# Allegro board democ.brd
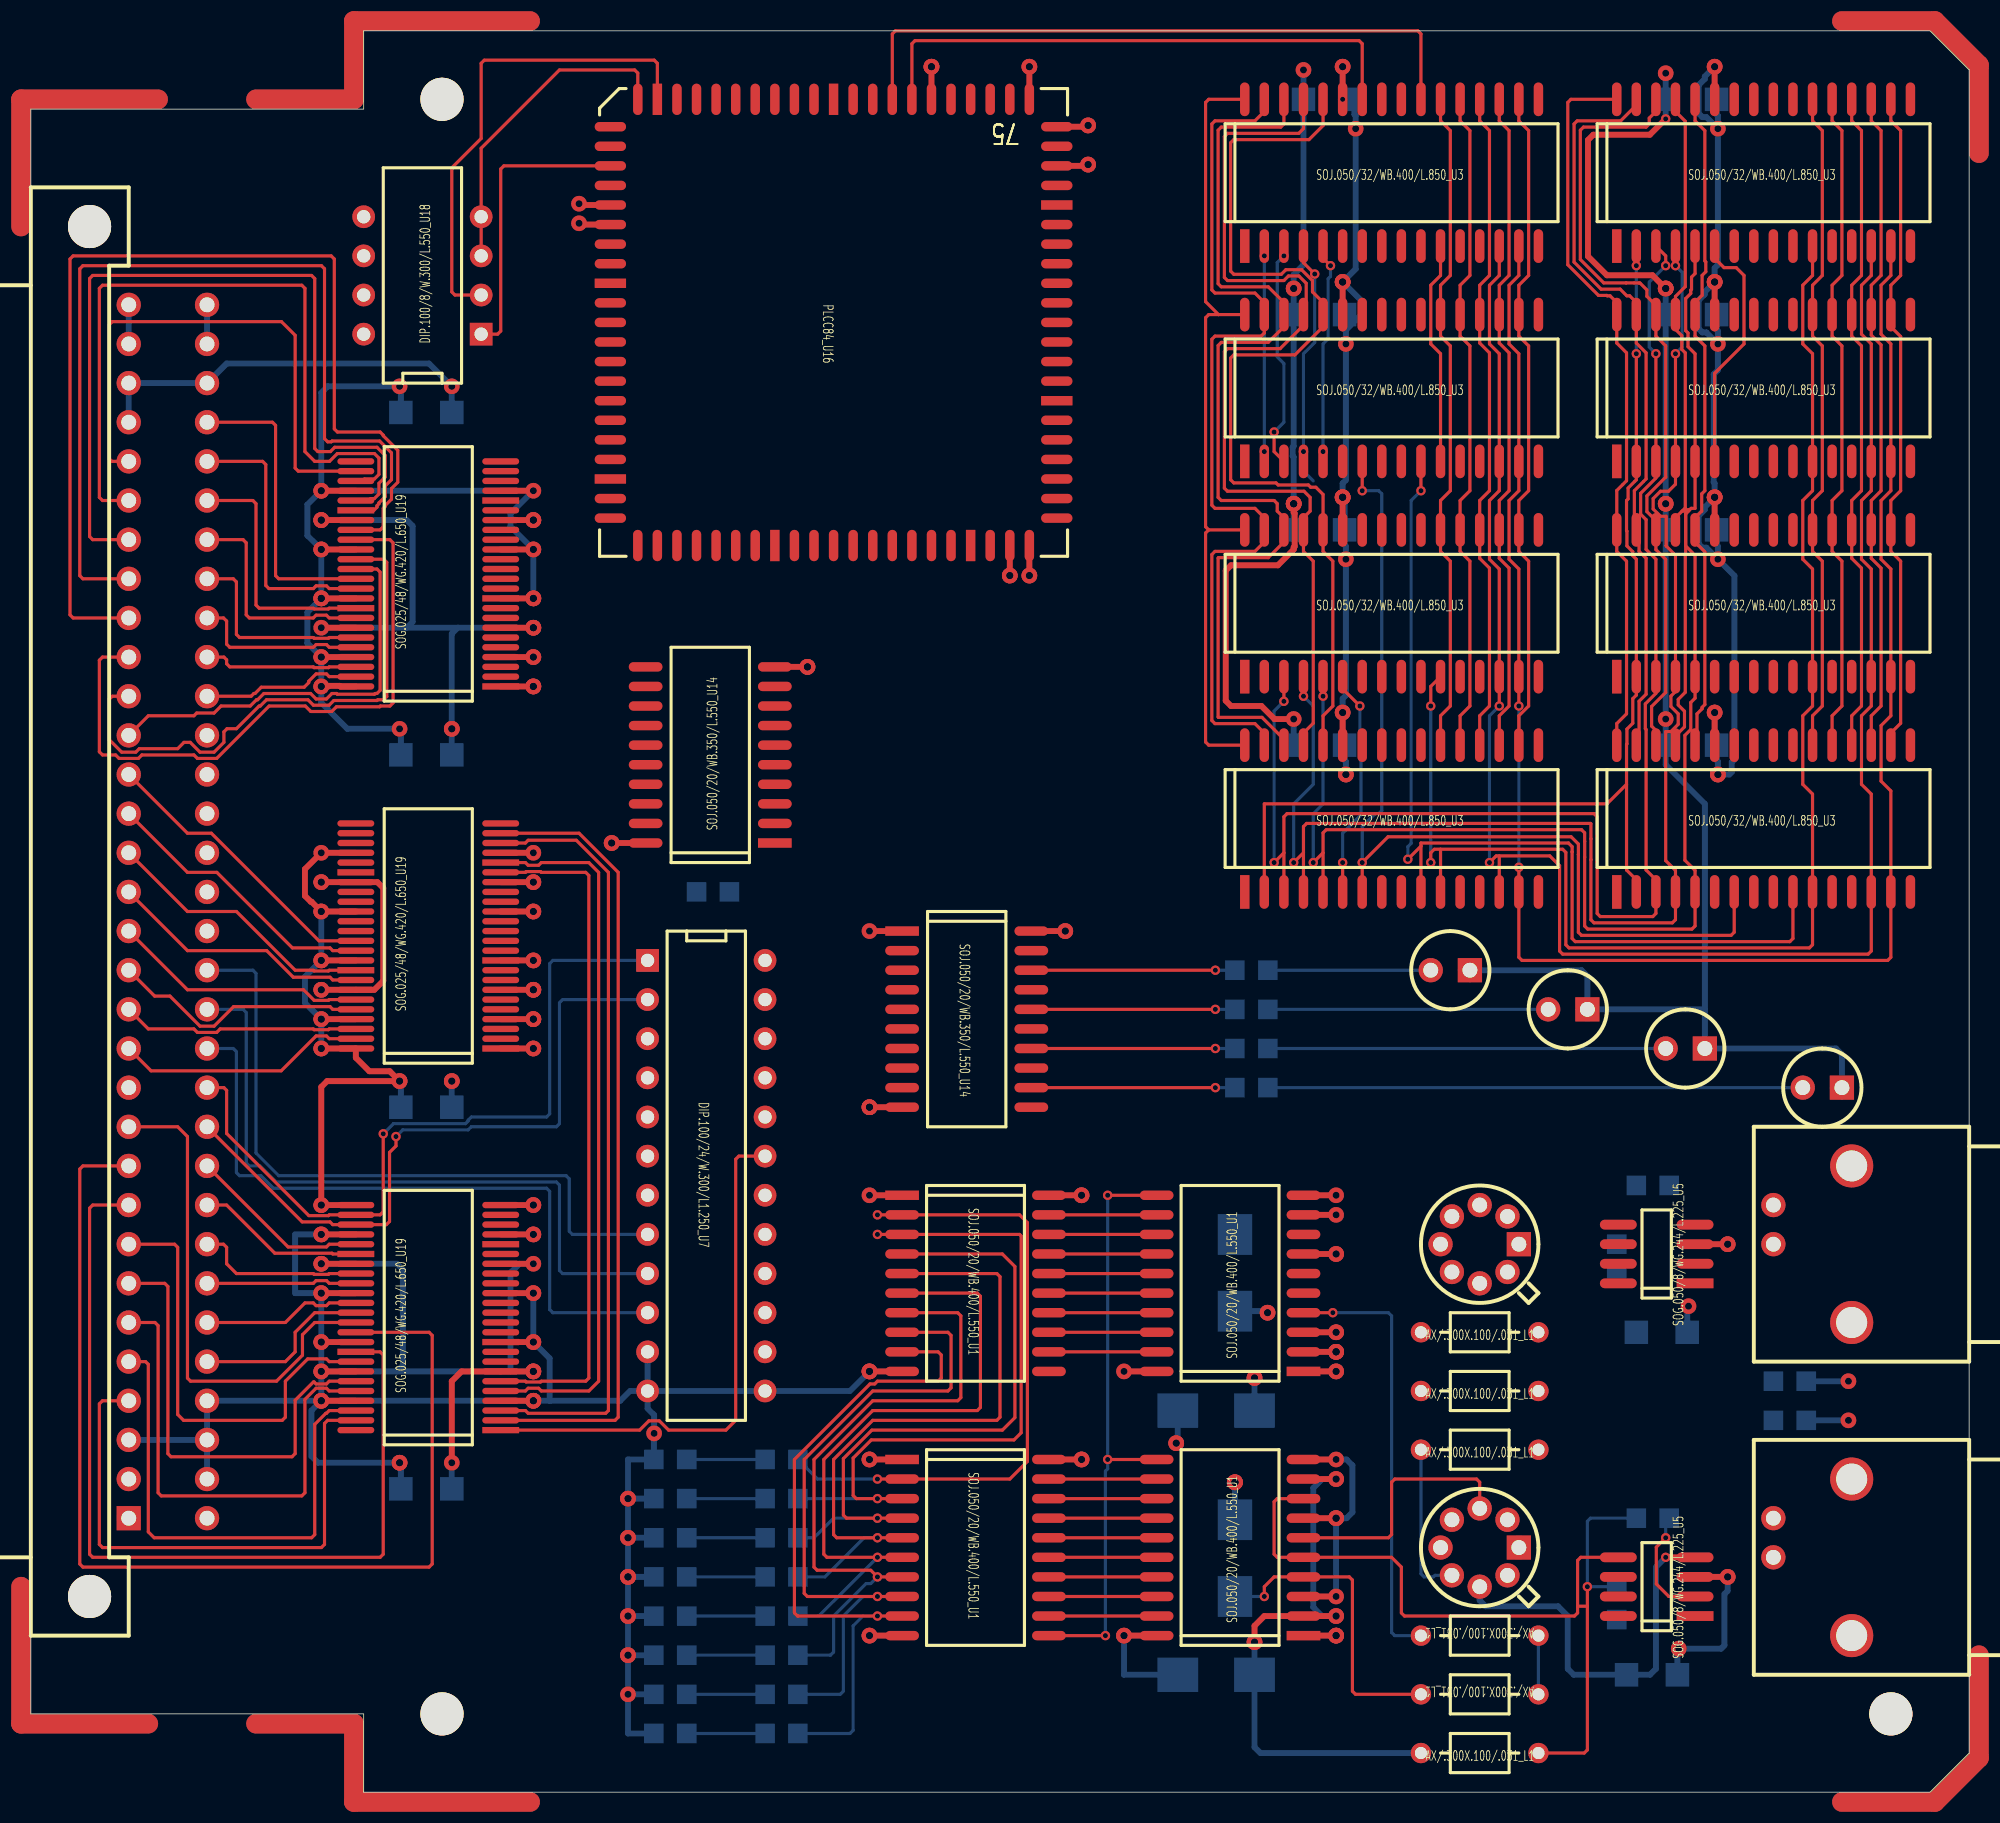
[diagram p0: board, top side]
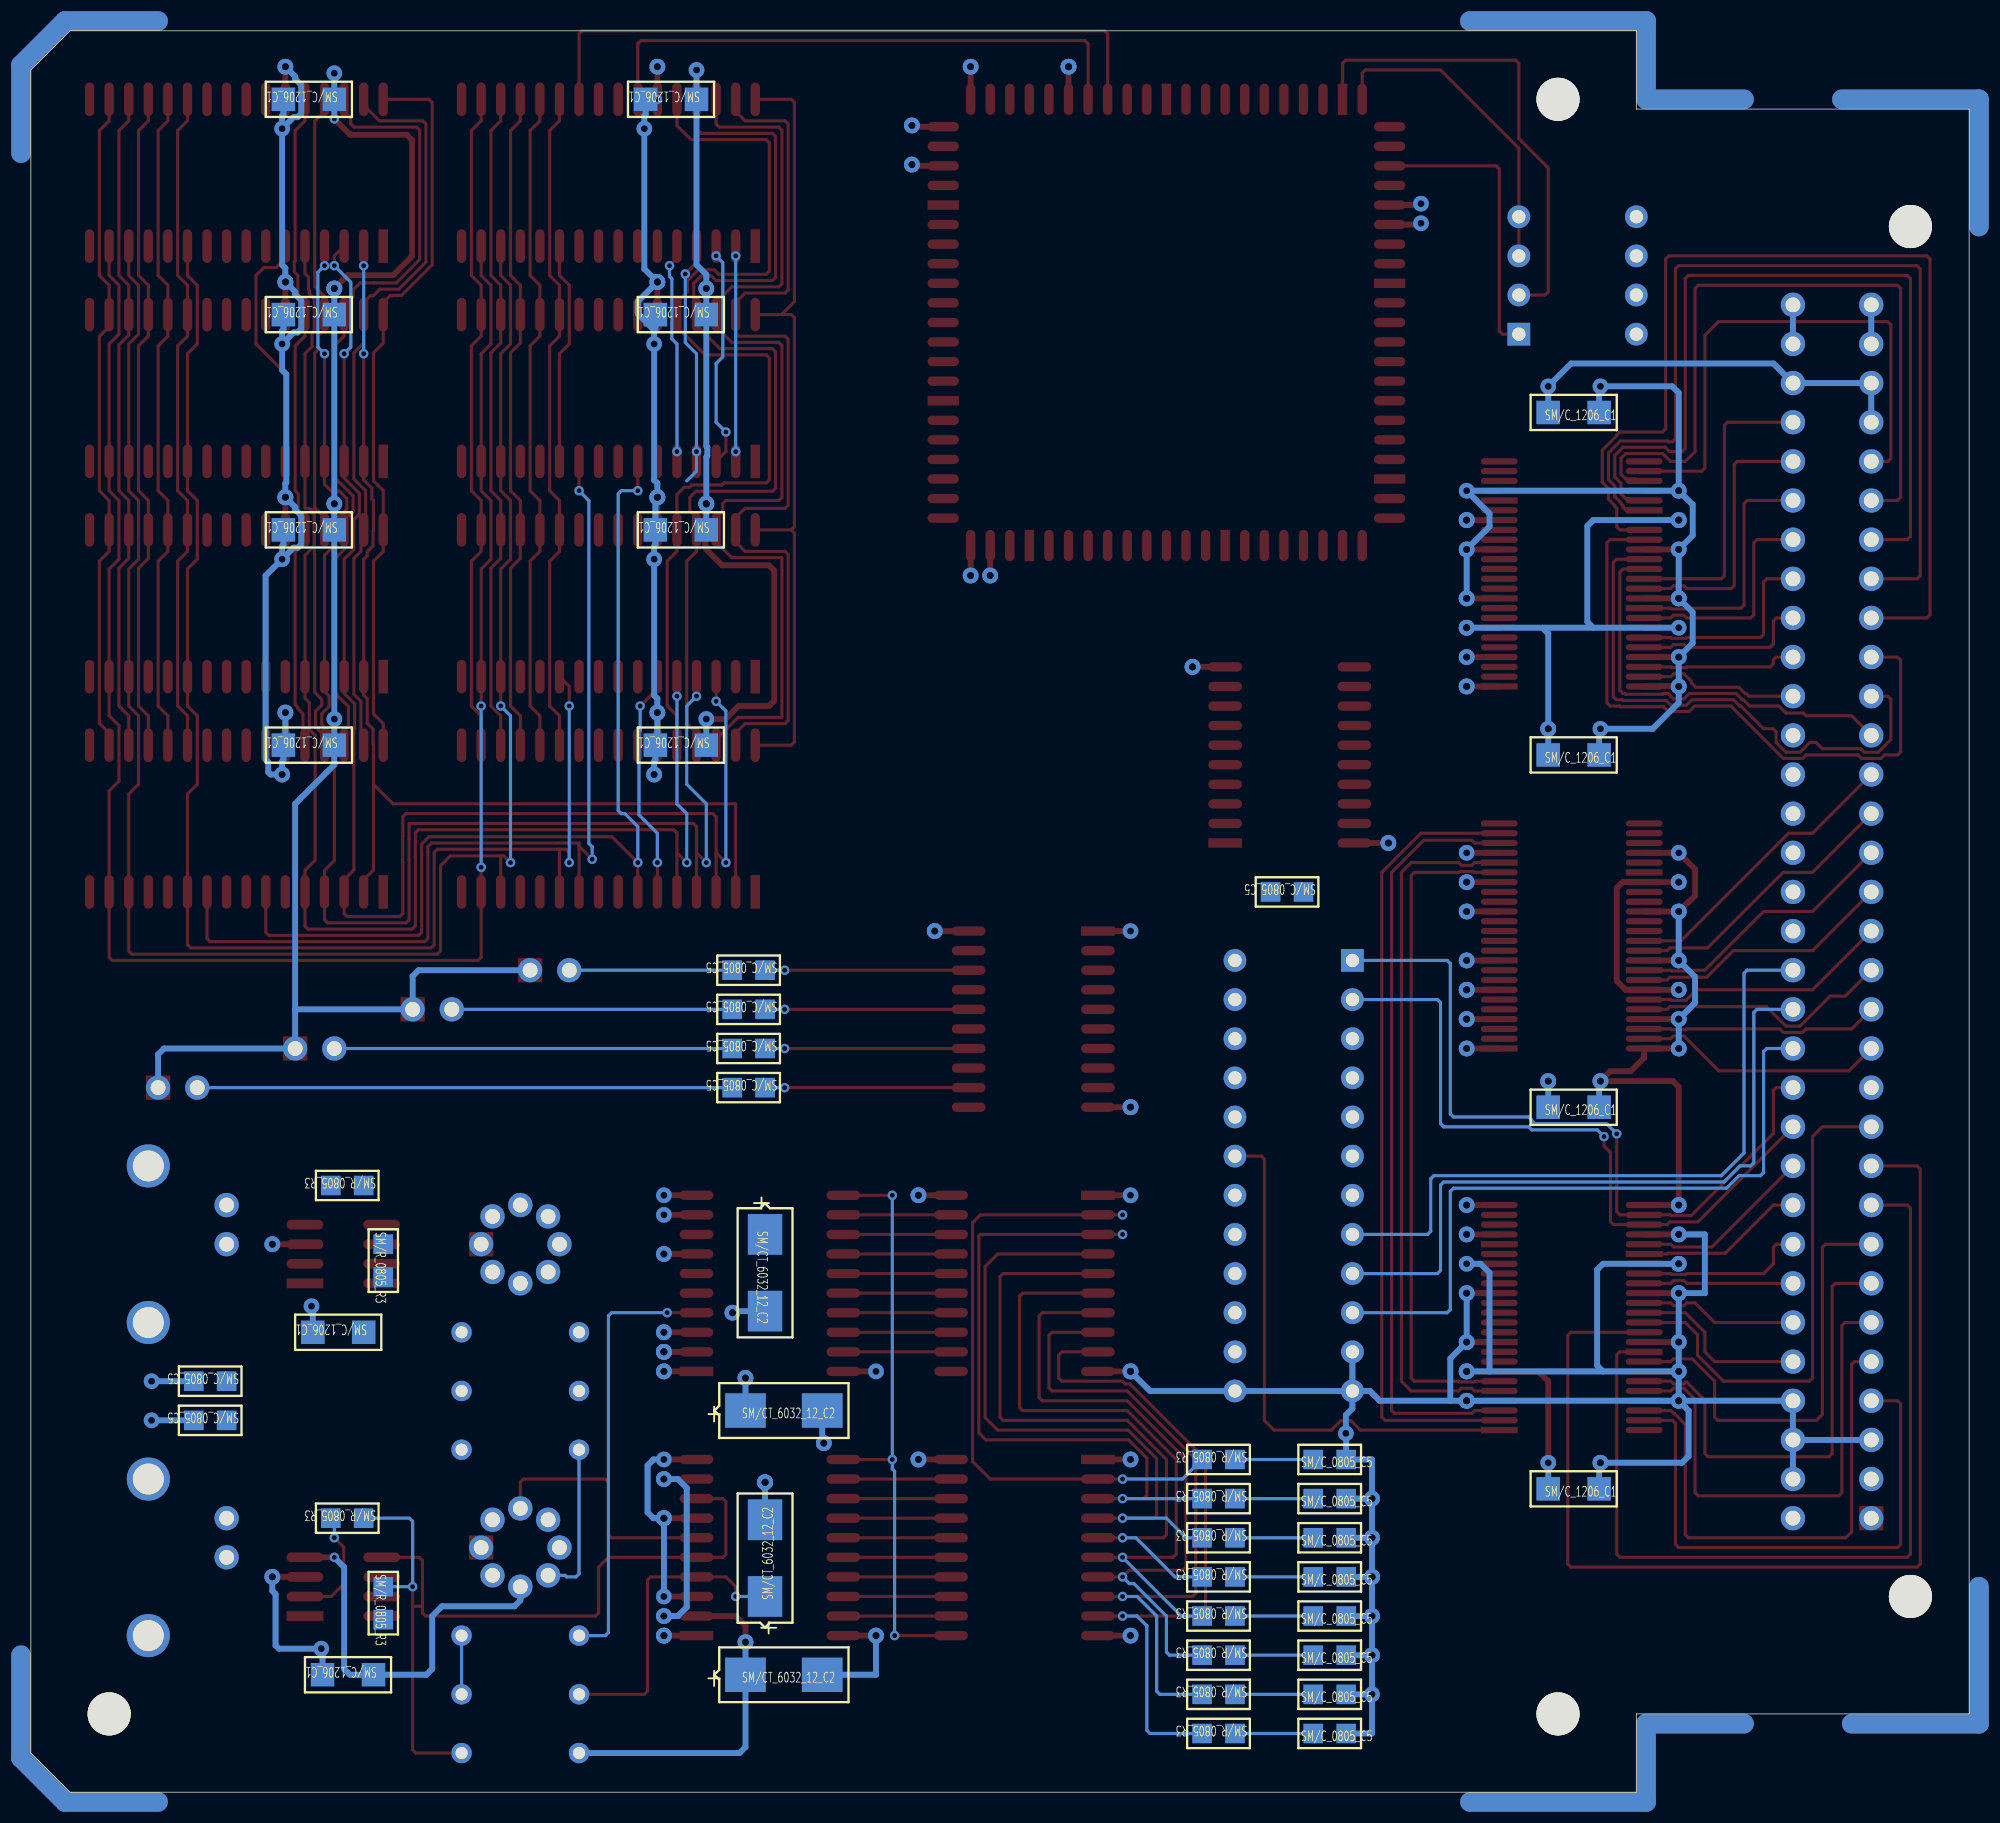
[diagram p1: board, bottom side, seen from below]

Outline 125.73 x 114.3 mm; copper layers: TOP, GND, POWER, BOTTOM. Coordinates in mm from the lower left corner of the outline.
Outline path: 0,109.22 21.59,109.22 21.59,114.3 123.19,114.3 125.73,111.76 125.73,2.54 123.19,0 21.59,0 21.59,5.08 0,5.08 0,109.22

## Design rules (mm)
nets with their own width: min track width 0.203; nets A0 A1 A2 A3 A4 A5 A6 A7 A8 A9 A10 A11 A12 A13 A14 A15 A16 A17 A18 A19 A20 A21 A22 A23 AEN/ BA0 BA1 BA2 BA3 BD0 BD1 BD2 BD3 BD4 BD5 BD6 BD7 BD8 BD9 BD10 BD11 BD12 BD13 BD14 BD15 BRD/ BRESET BWR/ D0 D1 D2 D3 D4 D5 D6 D7 D9 D10 D11 D12 D13 D14 D15 DDIR DEN/ DHEN/ FPGA/ GAIN HS/ MCLK MRD/ MWR/ N00036 N00036_6360 N00038 N00038_6372 N00044 N00044_6366 N00046 N00046_6362 N00048 N00048_6359 N00060 N00060_6368 N00306 N00318 N00322 N00671 N00689 N00703 N00717 N00827 N00831 N00835 N00837 N04966 N05690 N05692 N05694 N05696 N05698 N05700 N05702 N05704 N11940 N11950 N11984 N11994 N12004 N19706 N19710 N19714 N19718 N19934 N19938 N19942 N23417 N23878 N24816 N24821 N24826 N84247 N103899 N255822 N314771 N315146 N315333 N320476 N336036 N336041 OUTA OUTC RA0 RA1 RA2 RA3 RA4 RA5 RA6 RA7 RA8 RA9 RA10 RA11 RA12 RA13 RA14 RA15 RD0 RD1 RD2 RD3 RD4 RD5 RD6 RD7 RDY/ RESET/ SEL VCLKA VCLKC VD0 VD1 VD2 VD3 VD4 VD5 VD6 VD7 WAIT/ WSTAT/
nets with their own width: min track width 0.381; nets AGND GND GND_EARTH V12N V+12 VCC

## Placement (name value [footprint] x y rotation side)
C1  .1UF  [SMC1206]  104.14 29.84 0 bottom
C2  .1UF  [SMCT603212]  79.38 24.77 180 bottom
C3  .1UF  [SMCT603212]  79.38 7.62 180 bottom
C4  .1UF  [SMC1206]  106.05 109.86 0 bottom
C5  3300  [SMC0805]  42.55 6.35 180 bottom
C6  .1UF  [SMC1206]  103.51 7.62 0 bottom
C7  3300  [SMC0805]  42.55 21.59 180 bottom
C8  3300  [SMC0805]  42.55 8.89 180 bottom
C9  .1UF  [SMC1206]  27.3 89.53 180 bottom
C10  .1UF  [SMC1206]  27.3 67.31 180 bottom
C11  .1UF  [SMC1206]  27.3 44.45 180 bottom
C12  .1UF  [SMC1206]  106.05 81.91 0 bottom
C13  .1UF  [SMC1206]  106.05 95.89 0 bottom
C14  .1UF  [SMC1206]  106.05 67.95 0 bottom
C15  .1UF  [SMC1206]  27.3 19.69 180 bottom
C16  3300  [SMC0805]  42.55 11.43 180 bottom
C17  3300  [SMC0805]  42.55 13.97 180 bottom
C18  47PF  [SMC0805]  113.03 26.67 0 bottom
C19  3300  [SMC0805]  42.55 3.81 180 bottom
C20  3300  [SMC0805]  42.55 16.51 180 bottom
C21  .1UF  [SMCT603212]  78.11 12.7 90 bottom
C22  .1UF  [SMCT603212]  78.11 36.2 270 bottom
C23  47PF  [SMC0805]  113.03 24.13 0 bottom
C24  3300  [SMC0805]  42.55 19.05 180 bottom
C25  .1UF  [SMC1206]  82.55 109.86 0 bottom
C26  .1UF  [SMC1206]  81.92 95.89 0 bottom
C27  .1UF  [SMC1206]  81.92 81.91 0 bottom
C28  .1UF  [SMC1206]  81.92 67.95 0 bottom
D1  DIODE PHOTO EMIT  [LED]  100.97 50.8 180 top
D2  DIODE PHOTO EMIT  [LED]  93.34 53.34 180 top
D3  DIODE PHOTO EMIT  [LED]  108.59 48.26 180 top
D4  DIODE PHOTO EMIT  [LED]  117.48 45.72 180 top
J1  CON PAD  [DIN64P]  6.35 17.78 90 top
J2  CHANNEL 1  [BNC2P]  113.03 15.24 270 top
J3  CHANNEL 2  [BNC2P]  113.03 35.56 270 top
L1  50  [AX300X100031]  90.17 22.23 0 top
L2  50  [AX300X100031]  90.17 29.84 0 top
L3  50  [AX300X100031]  97.79 6.35 180 top
L4  50  [AX300X100031]  90.17 26.03 0 top
L5  50  [AX300X100031]  97.79 10.16 180 top
L6  50  [AX300X100031]  90.17 2.54 0 top
MTH1  -  [MTHOLE1]  26.67 109.86 0 top
MTH2  -  [MTHOLE1]  26.67 5.08 0 top
MTH3  -  [MTHOLE1]  120.65 5.08 0 top
R1  150  [SMC0805]  78.11 53.34 0 bottom
R2  150  [SMC0805]  78.11 50.8 0 bottom
R3  100  [SMR0805]  104.14 17.78 0 bottom
R4  100  [SMR0805]  102.87 13.34 270 bottom
R5  100  [SMR0805]  102.87 35.56 270 bottom
R6  100  [SMR0805]  104.14 39.37 0 bottom
R7  50  [SMR0805]  47.62 21.59 0 bottom
R8  50  [SMR0805]  47.62 8.89 0 bottom
R9  50  [SMR0805]  47.62 11.43 0 bottom
R10  50  [SMR0805]  47.62 6.35 0 bottom
R11  50  [SMC0805]  43.18 58.42 0 bottom
R12  150  [SMC0805]  78.11 45.72 0 bottom
R13  50  [SMR0805]  47.62 19.05 0 bottom
R14  50  [SMR0805]  47.62 16.51 0 bottom
R15  50  [SMR0805]  47.62 13.97 0 bottom
R16  50  [SMR0805]  47.62 3.81 0 bottom
R17  150  [SMC0805]  78.11 48.26 0 bottom
U1  TLC5602A  [SOJ05020WB400L550]  82.55 10.16 90 top
U2  TLC5602A  [SOJ05020WB400L550]  82.55 27.3 90 top
U3  TC55B4257J  [SOJ05032WB400L850]  102.87 86.36 0 top
U4  TC55B4257J  [SOJ05032WB400L850]  102.87 100.33 0 top
U5  DG419A  [SOG0508WG244L225]  107.95 33.02 90 top
U6  DG419A  [SOG0508WG244L225]  107.95 11.43 90 top
U7  20L10  [DIP10024W300L1250]  40 53.98 270 top
U8  TC55B4257J  [SOJ05032WB400L850]  78.74 72.39 0 top
U9  TC55B4257J  [SOJ05032WB400L850]  78.74 100.33 0 top
U10  TC55B4257J  [SOJ05032WB400L850]  102.87 72.39 0 top
U11  TC55B4257J  [SOJ05032WB400L850]  102.87 58.42 0 top
U12  TC55B4257J  [SOJ05032WB400L850]  78.74 58.42 0 top
U13  TC55B4257J  [SOJ05032WB400L850]  78.74 86.36 0 top
U14  ACT574  [SOJ05020WB350L550]  56.52 55.88 270 top
U15  ACT574  [SOJ05020WB400L550]  56.52 21.59 270 top
U16  EPF8282  [PLCC84]  52.07 109.86 270 top
U17  ACT574  [SOJ05020WB400L550]  56.52 38.73 270 top
U18  EPC1064  [DIP1008W300L550]  29.21 94.61 90 top
U19  FCT16245  [SOG02548WG420L650]  30.48 71.75 90 top
U20  FCT16245  [SOG02548WG420L650]  30.48 23.49 90 top
U21  FCT16245  [SOG02548WG420L650]  30.48 48.26 90 top
U22  TLE2037A  [TO-99]  96.52 35.56 90 top
U23  TLE2037A  [TO-99]  96.52 15.88 90 top
U25  74ACT574  [SOJ05020WB350L550]  48.26 61.59 90 top

## Library data of the parts
C1-C3 C5-C8 C16 C17 C19-C22 C24 = CAP: alternate symbols: (SMCT603212;SMC0805)
C4 C9-C15 C25-C28 = CAP_NP
C18 C23 = CAPACITOR
D1-D4 = DIODE_PHOTO_EMIT
J1 = 64CONSEPPINS
J2 J3 = BNC
L1-L6 = INDUCTOR
MTH1-MTH3 = MTHOLE1
R1-R17 = R: alternate symbols: (SMR0805)
U1 U2 = TLC5602A
U3 U4 U8-U13 = TC56B4257J
U5 U6 = DG419A
U7 = 20L10
U14 U15 U17 = ACT574: alternate symbols: (SOJ05020WB400L550)
U16 = FPGA_0
U18 = EPC1064
U19-U21 = FCT16245
U22 U23 = TLE2037A
U25 = 74ACT574

## Footprints (pads in the part's own frame, mm; a bottom-side part is the same pattern mirrored in y, then rotated)
AX300X100031
  round 1.321 hole 0.787: 1(0,0) 2(7.62,0)
BNC2P
  round 1.575 hole 0.965: 1(0,0) 2(-2.54,0)
  round 2.794 hole 2.007: 3(5.08,5.08) 4(-5.08,5.08)
DIN64P
  rect 1.575x1.575 hole 0.965: 1(0,0)
  round 1.575 hole 0.965: 2(2.54,0) 3(5.08,0) 4(7.62,0) 5(10.16,0) 6(12.7,0) 7(15.24,0) 8(17.78,0) 9(20.32,0) 10(22.86,0) 11(25.4,0) 12(27.94,0) 13(30.48,0) 14(33.02,0) 15(35.56,0) 16(38.1,0) 17(40.64,0) 18(43.18,0) 19(45.72,0) 20(48.26,0) 21(50.8,0) 22(53.34,0) 23(55.88,0) 24(58.42,0) 25(60.96,0) 26(63.5,0) 27(66.04,0) 28(68.58,0) 29(71.12,0) 30(73.66,0) 31(76.2,0) 32(78.74,0) 33(0,-5.08) 34(2.54,-5.08) 35(5.08,-5.08) 36(7.62,-5.08) 37(10.16,-5.08) 38(12.7,-5.08) 39(15.24,-5.08) 40(17.78,-5.08) 41(20.32,-5.08) 42(22.86,-5.08) 43(25.4,-5.08) 44(27.94,-5.08) 45(30.48,-5.08) 46(33.02,-5.08) 47(35.56,-5.08) 48(38.1,-5.08) 49(40.64,-5.08) 50(43.18,-5.08) 51(45.72,-5.08) 52(48.26,-5.08) 53(50.8,-5.08) 54(53.34,-5.08) 55(55.88,-5.08) 56(58.42,-5.08) 57(60.96,-5.08) 58(63.5,-5.08) 59(66.04,-5.08) 60(68.58,-5.08) 61(71.12,-5.08) 62(73.66,-5.08) 63(76.2,-5.08) 64(78.74,-5.08)
  round 2.794 hole 2.794: 65(83.82,2.54) 66(-5.08,2.54)
DIP1008W300L550
  rect 1.473x1.473 hole 0.864: 1(0,0)
  round 1.473 hole 0.864: 2(2.54,0) 3(5.08,0) 4(7.62,0) 5(7.62,7.62) 6(5.08,7.62) 7(2.54,7.62) 8(0,7.62)
DIP10024W300L1250
  rect 1.473x1.473 hole 0.864: 1(0,0)
  round 1.473 hole 0.864: 2(2.54,0) 3(5.08,0) 4(7.62,0) 5(10.16,0) 6(12.7,0) 7(15.24,0) 8(17.78,0) 9(20.32,0) 10(22.86,0) 11(25.4,0) 12(27.94,0) 13(27.94,7.62) 14(25.4,7.62) 15(22.86,7.62) 16(20.32,7.62) 17(17.78,7.62) 18(15.24,7.62) 19(12.7,7.62) 20(10.16,7.62) 21(7.62,7.62) 22(5.08,7.62) 23(2.54,7.62) 24(0,7.62)
LED
  rect 1.575x1.575 hole 0.965: 1(0,0)
  round 1.575 hole 0.965: 2(2.54,0)
MTHOLE1
  round 2.794 hole 2.794: 1(0,0)
PLCC84
  rect 2.032x0.61 smd: 1(0,0) 10(0,-11.43) 40(28.956,-3.81) 50(28.956,8.89)
  oval 2.032x0.61 smd: 2(0,-1.27) 3(0,-2.54) 4(0,-3.81) 5(0,-5.08) 6(0,-6.35) 7(0,-7.62) 8(0,-8.89) 9(0,-10.16) 11(0,-12.7) 33(28.956,-12.7) 34(28.956,-11.43) 35(28.956,-10.16) 36(28.956,-8.89) 37(28.956,-7.62) 38(28.956,-6.35) 39(28.956,-5.08) 41(28.956,-2.54) 42(28.956,-1.27) 43(28.956,0) 44(28.956,1.27) 45(28.956,2.54) 46(28.956,3.81) 47(28.956,5.08) 48(28.956,6.35) 49(28.956,7.62) 51(28.956,10.16) 52(28.956,11.43) 53(28.956,12.7) 75(0,12.7) 76(0,11.43) 77(0,10.16) 78(0,8.89) 79(0,7.62) 80(0,6.35) 81(0,5.08) 82(0,3.81) 83(0,2.54) 84(0,1.27)
  oval 0.61x2.032 smd: 12(1.778,-14.478) 13(3.048,-14.478) 14(4.318,-14.478) 15(5.588,-14.478) 16(6.858,-14.478) 17(8.128,-14.478) 18(9.398,-14.478) 19(10.668,-14.478) 21(13.208,-14.478) 22(14.478,-14.478) 23(15.748,-14.478) 24(17.018,-14.478) 25(18.288,-14.478) 26(19.558,-14.478) 27(20.828,-14.478) 28(22.098,-14.478) 29(23.368,-14.478) 31(25.908,-14.478) 32(27.178,-14.478) 54(27.178,14.478) 55(25.908,14.478) 56(24.638,14.478) 57(23.368,14.478) 58(22.098,14.478) 59(20.828,14.478) 61(18.288,14.478) 62(17.018,14.478) 63(15.748,14.478) 64(14.478,14.478) 65(13.208,14.478) 66(11.938,14.478) 67(10.668,14.478) 68(9.398,14.478) 69(8.128,14.478) 71(5.588,14.478) 72(4.318,14.478) 73(3.048,14.478) 74(1.778,14.478)
  rect 0.61x2.032 smd: 20(11.938,-14.478) 30(24.638,-14.478) 60(19.558,14.478) 70(6.858,14.478)
SMC0805
  rect 1.27x1.27 smd: 1(0,0) 2(2.134,0)
SMC1206
  rect 1.524x1.524 smd: 1(0,0) 2(3.302,0)
SMCT603212
  rect 2.642x2.235 smd: 1(0,0) 2(4.978,0)
SMR0805
  rect 1.27x1.27 smd: 1(0,0) 2(2.134,0)
SOG0508WG244L225
  rect 0.635x2.388 smd: 1(0,0)
  oval 0.635x2.388 smd: 2(1.27,0) 3(2.54,0) 4(3.81,0) 5(3.81,4.978) 6(2.54,4.978) 7(1.27,4.978) 8(0,4.978)
SOG02548WG420L650
  rect 0.406x2.388 smd: 1(0,0) 10(5.715,0) 20(12.065,0) 30(11.43,9.398) 40(5.08,9.398)
  oval 0.406x2.388 smd: 2(0.635,0) 3(1.27,0) 4(1.905,0) 5(2.54,0) 6(3.175,0) 7(3.81,0) 8(4.445,0) 9(5.08,0) 11(6.35,0) 12(6.985,0) 13(7.62,0) 14(8.255,0) 15(8.89,0) 16(9.525,0) 17(10.16,0) 18(10.795,0) 19(11.43,0) 21(12.7,0) 22(13.335,0) 23(13.97,0) 24(14.605,0) 25(14.605,9.398) 26(13.97,9.398) 27(13.335,9.398) 28(12.7,9.398) 29(12.065,9.398) 31(10.795,9.398) 32(10.16,9.398) 33(9.525,9.398) 34(8.89,9.398) 35(8.255,9.398) 36(7.62,9.398) 37(6.985,9.398) 38(6.35,9.398) 39(5.715,9.398) 41(4.445,9.398) 42(3.81,9.398) 43(3.175,9.398) 44(2.54,9.398) 45(1.905,9.398) 46(1.27,9.398) 47(0.635,9.398) 48(0,9.398)
SOJ05020WB350L550
  rect 0.61x2.184 smd: 1(0,0)
  oval 0.61x2.184 smd: 2(1.27,0) 3(2.54,0) 4(3.81,0) 5(5.08,0) 6(6.35,0) 7(7.62,0) 8(8.89,0) 9(10.16,0) 10(11.43,0) 11(11.43,8.382) 12(10.16,8.382) 13(8.89,8.382) 14(7.62,8.382) 15(6.35,8.382) 16(5.08,8.382) 17(3.81,8.382) 18(2.54,8.382) 19(1.27,8.382) 20(0,8.382)
SOJ05020WB400L550
  rect 0.61x2.184 smd: 1(0,0)
  oval 0.61x2.184 smd: 2(1.27,0) 3(2.54,0) 4(3.81,0) 5(5.08,0) 6(6.35,0) 7(7.62,0) 8(8.89,0) 9(10.16,0) 10(11.43,0) 11(11.43,9.525) 12(10.16,9.525) 13(8.89,9.525) 14(7.62,9.525) 15(6.35,9.525) 16(5.08,9.525) 17(3.81,9.525) 18(2.54,9.525) 19(1.27,9.525) 20(0,9.525)
SOJ05032WB400L850
  rect 0.61x2.184 smd: 1(0,0)
  oval 0.61x2.184 smd: 2(1.27,0) 3(2.54,0) 4(3.81,0) 5(5.08,0) 6(6.35,0) 7(7.62,0) 8(8.89,0) 9(10.16,0) 10(11.43,0) 11(12.7,0) 12(13.97,0) 13(15.24,0) 14(16.51,0) 15(17.78,0) 16(19.05,0) 17(19.05,9.525) 18(17.78,9.525) 19(16.51,9.525) 20(15.24,9.525) 21(13.97,9.525) 22(12.7,9.525) 23(11.43,9.525) 24(10.16,9.525) 25(8.89,9.525) 26(7.62,9.525) 27(6.35,9.525) 28(5.08,9.525) 29(3.81,9.525) 30(2.54,9.525) 31(1.27,9.525) 32(0,9.525)
TO-99
  rect 1.575x1.575 hole 0.965: 1(0,0)
  round 1.575 hole 0.965: 2(1.803,0.737) 3(2.54,2.54) 4(1.803,4.343) 5(0,5.08) 6(-1.803,4.343) 7(-2.54,2.54) 8(-1.803,0.737)

## Nets
AGND: C1.2(TP-2) C6.2(TP-2) C21.2(TP-2) C22.2(TP-2) J1.1(TP-1) J1.2(TP-2) J1.33(TP-33) U1.3(TP-3) U1.7(TP-7) U1.10(TP-10) U2.3(TP-3) U2.7(TP-7) U2.10(TP-10) U5.3(TP-3) U6.3(TP-3)
GND: C2.2(TP-2) C3.2(TP-2) C4.2(TP-2) C5.2(TP-2) C7.2(TP-2) C8.2(TP-2) C9.2(TP-2) C10.2(TP-2) C11.2(TP-2) C12.2(TP-2) C13.2(TP-2) C14.2(TP-2) C15.2(TP-2) C16.2(TP-2) C17.2(TP-2) C19.2(TP-2) C20.2(TP-2) C24.2(TP-2) C25.2(TP-2) C26.2(TP-2) C27.2(TP-2) C28.2(TP-2) J1.3(TP-3) J1.34(TP-34) J1.35(TP-35) J1.36(TP-36) U1.1(TP-1) U1.20(TP-20) U2.1(TP-1) U2.20(TP-20) U3.27(TP-27) U4.27(TP-27) U7.11(TP-11) U7.12(TP-12) U7.13(TP-13) U8.27(TP-27) U9.27(TP-27) U10.27(TP-27) U11.27(TP-27) U12.27(TP-27) U13.27(TP-27) U14.1(TP-1) U14.10(TP-10) U15.1(TP-1) U15.10(TP-10) U16.17(TP-17) U16.53(TP-53) U16.74(TP-74) U16.75(TP-75) U17.1(TP-1) U17.10(TP-10) U19.1(TP-1) U19.4(TP-4) U19.10(TP-10) U19.15(TP-15) U19.21(TP-21) U19.28(TP-28) U19.34(TP-34) U19.39(TP-39) U19.45(TP-45) U19.48(TP-48) U20.4(TP-4) U20.10(TP-10) U20.15(TP-15) U20.21(TP-21) U20.24(TP-24) U20.25(TP-25) U20.28(TP-28) U20.34(TP-34) U20.39(TP-39) U20.45(TP-45) U21.1(TP-1) U21.4(TP-4) U21.10(TP-10) U21.15(TP-15) U21.21(TP-21) U21.28(TP-28) U21.34(TP-34) U21.39(TP-39) U21.45(TP-45) U21.48(TP-48) U25.10(TP-10)
GND_EARTH: C18.2(TP-2) C23.2(TP-2) J2.2(TP-2) J3.2(TP-2)
V12N: J1.31(TP-31) J1.32(TP-32) U5.7(TP-7) U6.7(TP-7) U22.4(TP-4) U23.4(TP-4)
VCC: C2.1(TP-1) C3.1(TP-1) C4.1(TP-1) C9.1(TP-1) C10.1(TP-1) C11.1(TP-1) C12.1(TP-1) C13.1(TP-1) C14.1(TP-1) C15.1(TP-1) C25.1(TP-1) C26.1(TP-1) C27.1(TP-1) C28.1(TP-1) D1.1(TP-1) D2.1(TP-1) D3.1(TP-1) D4.1(TP-1) J1.29(TP-29) J1.30(TP-30) J1.62(TP-62) L2.1(TP-1) L6.1(TP-1) U1.2(TP-2) U1.9(TP-9) U2.2(TP-2) U2.9(TP-9) U7.24(TP-24) U14.20(TP-20) U15.20(TP-20) U16.16(TP-16) U16.52(TP-52) U16.72(TP-72) U16.80(TP-80) U17.20(TP-20) U19.7(TP-7) U19.18(TP-18) U19.31(TP-31) U19.42(TP-42) U20.7(TP-7) U20.18(TP-18) U20.31(TP-31) U20.42(TP-42) U21.7(TP-7) U21.18(TP-18) U21.31(TP-31) U21.42(TP-42) U25.20(TP-20)
A0: J1.54(TP-54) U19.47(TP-47)
A1: J1.55(TP-55) U19.46(TP-46)
A2: J1.56(TP-56) U19.44(TP-44)
A3: J1.57(TP-57) U19.43(TP-43)
A4: J1.58(TP-58) U19.41(TP-41)
A5: J1.59(TP-59) U19.40(TP-40)
A6: J1.60(TP-60) U19.38(TP-38)
A7: J1.61(TP-61) U19.37(TP-37)
A8: J1.13(TP-13) U21.47(TP-47)
A9: J1.14(TP-14) U21.46(TP-46)
A10: J1.15(TP-15) U21.44(TP-44)
A11: J1.16(TP-16) U21.43(TP-43)
A12: J1.17(TP-17) U21.41(TP-41)
A13: J1.18(TP-18) U21.40(TP-40)
A14: J1.19(TP-19) U21.38(TP-38)
A15: J1.20(TP-20) U21.37(TP-37)
A16: J1.37(TP-37) U20.36(TP-36)
A17: J1.38(TP-38) U20.35(TP-35)
A18: J1.39(TP-39) U7.6(TP-6) U20.33(TP-33)
A19: J1.40(TP-40) U7.5(TP-5) U20.32(TP-32)
A20: J1.41(TP-41) U7.4(TP-4) U20.30(TP-30)
A21: J1.42(TP-42) U7.3(TP-3) U20.29(TP-29)
A22: J1.43(TP-43) U7.2(TP-2) U20.27(TP-27)
A23: J1.44(TP-44) U7.1(TP-1) U20.26(TP-26)
AEN/: J1.47(TP-47) U7.8(TP-8)
BA0: U16.6(TP-6) U19.2(TP-2) U20.13(TP-13) U21.2(TP-2)
BA1: U16.7(TP-7) U19.3(TP-3) U20.14(TP-14) U21.3(TP-3)
BA2: U16.8(TP-8) U19.5(TP-5) U20.16(TP-16) U21.5(TP-5)
BA3: U16.9(TP-9) U19.6(TP-6) U20.17(TP-17) U21.6(TP-6)
BD0: U16.25(TP-25) U19.13(TP-13)
BD1: U16.24(TP-24) U19.14(TP-14)
BD2: U16.23(TP-23) U19.16(TP-16)
BD3: U16.22(TP-22) U19.17(TP-17)
BD4: U16.21(TP-21) U19.19(TP-19)
BD5: U16.20(TP-20) U19.20(TP-20)
BD6: U16.19(TP-19) U19.22(TP-22)
BD7: U16.18(TP-18) U19.23(TP-23)
BD8: U20.2(TP-2) U21.23(TP-23)
BD9: U20.3(TP-3) U21.22(TP-22)
BD10: U20.5(TP-5) U21.20(TP-20)
BD11: U20.6(TP-6) U21.19(TP-19)
BD12: U20.8(TP-8) U21.17(TP-17)
BD13: U20.9(TP-9) U21.16(TP-16)
BD14: U20.11(TP-11) U21.14(TP-14)
BD15: U20.12(TP-12) U21.13(TP-13)
BRD/: U7.15(TP-15) U16.73(TP-73)
BRESET: U7.14(TP-14) U16.12(TP-12)
BWR/: U7.16(TP-16) U16.54(TP-54)
D0: J1.28(TP-28) U19.26(TP-26) U21.26(TP-26)
D1: J1.27(TP-27) U19.27(TP-27) U21.27(TP-27)
D2: J1.26(TP-26) U19.29(TP-29) U21.29(TP-29)
D3: J1.25(TP-25) U19.30(TP-30) U21.30(TP-30)
D4: J1.24(TP-24) U19.32(TP-32) U21.32(TP-32)
D5: J1.23(TP-23) U19.33(TP-33) U21.33(TP-33)
D6: J1.4(TP-4) J1.22(TP-22) U19.35(TP-35) U20.47(TP-47) U21.35(TP-35)
D7: J1.21(TP-21) U19.36(TP-36) U21.36(TP-36)
D9: J1.5(TP-5) U20.46(TP-46)
D10: J1.6(TP-6) U20.44(TP-44)
D11: J1.7(TP-7) U20.43(TP-43)
D12: J1.8(TP-8) U20.41(TP-41)
D13: J1.9(TP-9) U20.40(TP-40)
D14: J1.10(TP-10) U20.38(TP-38)
D15: J1.11(TP-11) U20.37(TP-37)
DDIR: U7.19(TP-19) U19.24(TP-24) U20.1(TP-1) U21.24(TP-24)
DEN/: U7.20(TP-20) U19.25(TP-25) U20.48(TP-48)
DHEN/: U7.21(TP-21) U21.25(TP-25)
FPGA/: U7.17(TP-17) U16.30(TP-30)
GAIN: U5.6(TP-6) U6.6(TP-6) U16.28(TP-28)
HS/: U7.18(TP-18) U16.29(TP-29)
MCLK: J1.52(TP-52) U16.31(TP-31)
MRD/: J1.46(TP-46) U7.9(TP-9)
MWR/: J1.45(TP-45) U7.10(TP-10)
N00036_6360: L6.2(TP-2) R3.1(TP-1) R4.1(TP-1) U1.5(TP-5) U1.8(TP-8) U6.5(TP-5)
N00038_6372: C21.1(TP-1) L3.2(TP-2) U1.4(TP-4)
N00044_6366: U6.1(TP-1) U23.2(TP-2)
N00046_6362: R4.2(TP-2) U6.8(TP-8)
N00048_6359: R3.2(TP-2) U6.2(TP-2)
N00060_6368: U1.6(TP-6) U23.3(TP-3)
OUTA: L1.1(TP-1) U23.6(TP-6)
OUTC: L4.1(TP-1) U22.6(TP-6)
RA0: U3.5(TP-5) U4.5(TP-5) U8.5(TP-5) U9.5(TP-5) U10.5(TP-5) U11.5(TP-5) U12.5(TP-5) U13.5(TP-5) U16.58(TP-58)
RA1: U3.4(TP-4) U4.4(TP-4) U8.4(TP-4) U9.4(TP-4) U10.4(TP-4) U11.4(TP-4) U12.4(TP-4) U13.4(TP-4) U16.60(TP-60)
RA2: U3.3(TP-3) U4.3(TP-3) U8.3(TP-3) U9.3(TP-3) U10.3(TP-3) U11.3(TP-3) U12.3(TP-3) U13.3(TP-3) U16.61(TP-61)
RA3: U3.2(TP-2) U4.2(TP-2) U8.2(TP-2) U9.2(TP-2) U10.2(TP-2) U11.2(TP-2) U12.2(TP-2) U13.2(TP-2) U16.62(TP-62)
RA4: U3.32(TP-32) U4.32(TP-32) U8.32(TP-32) U9.32(TP-32) U10.32(TP-32) U11.32(TP-32) U12.32(TP-32) U13.32(TP-32) U16.63(TP-63)
RA5: U3.31(TP-31) U4.31(TP-31) U8.31(TP-31) U9.31(TP-31) U10.31(TP-31) U11.31(TP-31) U12.31(TP-31) U13.31(TP-31) U16.64(TP-64)
RA6: U3.30(TP-30) U4.30(TP-30) U8.30(TP-30) U9.30(TP-30) U10.30(TP-30) U11.30(TP-30) U12.30(TP-30) U13.30(TP-30) U16.65(TP-65)
RA7: U3.29(TP-29) U4.29(TP-29) U8.29(TP-29) U9.29(TP-29) U10.29(TP-29) U11.29(TP-29) U12.29(TP-29) U13.29(TP-29) U16.66(TP-66)
RA8: U3.28(TP-28) U4.28(TP-28) U8.28(TP-28) U9.28(TP-28) U10.28(TP-28) U11.28(TP-28) U12.28(TP-28) U13.28(TP-28) U16.67(TP-67)
RA9: U3.22(TP-22) U4.22(TP-22) U8.22(TP-22) U9.22(TP-22) U10.22(TP-22) U11.22(TP-22) U12.22(TP-22) U13.22(TP-22) U16.69(TP-69)
RA10: U3.21(TP-21) U4.21(TP-21) U8.21(TP-21) U9.21(TP-21) U10.21(TP-21) U11.21(TP-21) U12.21(TP-21) U13.21(TP-21) U16.70(TP-70)
RA11: U3.20(TP-20) U4.20(TP-20) U8.20(TP-20) U9.20(TP-20) U10.20(TP-20) U11.20(TP-20) U12.20(TP-20) U13.20(TP-20) U16.71(TP-71)
RA12: U3.19(TP-19) U4.19(TP-19) U8.19(TP-19) U9.19(TP-19) U10.19(TP-19) U11.19(TP-19) U12.19(TP-19) U13.19(TP-19) U16.76(TP-76)
RA13: U3.18(TP-18) U4.18(TP-18) U8.18(TP-18) U9.18(TP-18) U10.18(TP-18) U11.18(TP-18) U12.18(TP-18) U13.18(TP-18) U16.77(TP-77)
RA14: U3.15(TP-15) U4.15(TP-15) U8.15(TP-15) U9.15(TP-15) U10.15(TP-15) U11.15(TP-15) U12.15(TP-15) U13.15(TP-15) U16.78(TP-78)
RA15: U3.14(TP-14) U4.14(TP-14) U8.14(TP-14) U9.14(TP-14) U10.14(TP-14) U11.14(TP-14) U12.14(TP-14) U13.14(TP-14) U16.79(TP-79)
RD0: U4.26(TP-26) U8.26(TP-26) U9.26(TP-26) U10.26(TP-26) U16.81(TP-81)
RD1: U4.23(TP-23) U8.23(TP-23) U9.23(TP-23) U10.23(TP-23) U16.82(TP-82)
RD2: U4.10(TP-10) U8.10(TP-10) U9.10(TP-10) U10.10(TP-10) U16.83(TP-83)
RD3: U4.7(TP-7) U8.7(TP-7) U9.7(TP-7) U10.7(TP-7) U16.84(TP-84)
RD4: U3.26(TP-26) U11.26(TP-26) U12.26(TP-26) U13.26(TP-26) U16.1(TP-1)
RD5: U3.23(TP-23) U11.23(TP-23) U12.23(TP-23) U13.23(TP-23) U16.2(TP-2)
RD6: U3.10(TP-10) U11.10(TP-10) U12.10(TP-10) U13.10(TP-10) U16.3(TP-3)
RD7: U3.7(TP-7) U11.7(TP-7) U12.7(TP-7) U13.7(TP-7) U16.4(TP-4)
RDY/: J1.50(TP-50) U7.22(TP-22)
RESET/: J1.53(TP-53) U16.15(TP-15)
SEL: U7.23(TP-23) U16.13(TP-13)
V+12: C1.1(TP-1) C6.1(TP-1) J1.63(TP-63) J1.64(TP-64) U5.4(TP-4) U6.4(TP-4) U22.7(TP-7) U23.7(TP-7)
VCLKA: U1.11(TP-11) U2.11(TP-11) U15.11(TP-11) U16.34(TP-34)
VCLKC: R11.2(TP-2) U17.11(TP-11)
VD0: R7.2(TP-2) U14.2(TP-2) U15.2(TP-2) U16.39(TP-39) U17.2(TP-2)
VD1: R13.2(TP-2) U14.3(TP-3) U15.3(TP-3) U16.40(TP-40) U17.3(TP-3)
VD2: R14.2(TP-2) U14.4(TP-4) U15.4(TP-4) U16.41(TP-41) U17.4(TP-4)
VD3: R15.2(TP-2) U14.5(TP-5) U15.5(TP-5) U16.42(TP-42) U17.5(TP-5)
VD4: R9.2(TP-2) U14.6(TP-6) U15.6(TP-6) U16.43(TP-43) U17.6(TP-6)
VD5: R8.2(TP-2) U14.7(TP-7) U15.7(TP-7) U16.44(TP-44) U17.7(TP-7)
VD6: R10.2(TP-2) U14.8(TP-8) U15.8(TP-8) U16.45(TP-45) U17.8(TP-8)
VD7: R16.2(TP-2) U14.9(TP-9) U15.9(TP-9) U16.46(TP-46) U17.9(TP-9)
WAIT/: J1.51(TP-51) U16.33(TP-33)
WSTAT/: U14.11(TP-11) U16.56(TP-56)
N00036: L2.2(TP-2) R5.1(TP-1) R6.1(TP-1) U2.5(TP-5) U2.8(TP-8) U5.5(TP-5)
N00038: C22.1(TP-1) L5.2(TP-2) U2.4(TP-4)
N00044: U5.1(TP-1) U22.2(TP-2)
N00046: R5.2(TP-2) U5.8(TP-8)
N00048: R6.2(TP-2) U5.2(TP-2)
N00060: U2.6(TP-6) U22.3(TP-3)
N00306: U1.12(TP-12) U15.19(TP-19)
N00318: U1.15(TP-15) U15.16(TP-16)
N00322: U1.16(TP-16) U15.15(TP-15)
N00671: C19.1(TP-1) R16.1(TP-1)
N00689: C5.1(TP-1) R10.1(TP-1)
N00703: C8.1(TP-1) R8.1(TP-1)
N00717: C16.1(TP-1) R9.1(TP-1)
N00827: C17.1(TP-1) R15.1(TP-1)
N00831: C20.1(TP-1) R14.1(TP-1)
N00835: C24.1(TP-1) R13.1(TP-1)
N00837: C7.1(TP-1) R7.1(TP-1)
N04966: L3.1(TP-1) L5.1(TP-1)
N05690: U2.12(TP-12) U17.19(TP-19)
N05692: U2.18(TP-18) U17.13(TP-13)
N05694: U2.13(TP-13) U17.18(TP-18)
N05696: U2.19(TP-19) U17.12(TP-12)
N05698: U2.17(TP-17) U17.14(TP-14)
N05700: U2.14(TP-14) U17.17(TP-17)
N05702: U2.15(TP-15) U17.16(TP-16)
N05704: U2.16(TP-16) U17.15(TP-15)
N11940: U1.13(TP-13) U15.18(TP-18)
N11950: U1.14(TP-14) U15.17(TP-17)
N11984: U1.17(TP-17) U15.14(TP-14)
N11994: U1.18(TP-18) U15.13(TP-13)
N12004: U1.19(TP-19) U15.12(TP-12)
N19706: R1.1(TP-1) U14.18(TP-18)
N19710: R2.1(TP-1) U14.16(TP-16)
N19714: R17.1(TP-1) U14.14(TP-14)
N19718: R12.1(TP-1) U14.12(TP-12)
N19934: D4.2(TP-2) R12.2(TP-2)
N19938: D3.2(TP-2) R17.2(TP-2)
N19942: D1.2(TP-2) R2.2(TP-2)
N23417: U10.6(TP-6) U13.6(TP-6) U16.48(TP-48)
N23878: R11.1(TP-1) U16.36(TP-36)
N24816: U16.14(TP-14) U18.1(TP-1)
N24821: U16.10(TP-10) U18.2(TP-2)
N24826: U16.11(TP-11) U18.3(TP-3) U18.4(TP-4)
N84247: U19.9(TP-9) U20.22(TP-22) U21.9(TP-9) U21.12(TP-12)
N103899: U19.8(TP-8) U19.12(TP-12) U20.19(TP-19) U20.23(TP-23) U21.8(TP-8) U21.11(TP-11)
N255822: D2.2(TP-2) R1.2(TP-2)
N314771: U3.6(TP-6) U4.6(TP-6) U16.51(TP-51)
N315146: U9.6(TP-6) U11.6(TP-6) U16.50(TP-50)
N315333: U8.6(TP-6) U12.6(TP-6) U16.49(TP-49)
N320476: U3.11(TP-11) U4.11(TP-11) U8.11(TP-11) U9.11(TP-11) U10.11(TP-11) U11.11(TP-11) U12.11(TP-11) U13.11(TP-11) U16.57(TP-57)
N336036: C23.1(TP-1) J2.1(TP-1) L1.2(TP-2)
N336041: C18.1(TP-1) J3.1(TP-1) L4.2(TP-2)

Pads without a net: J1 12 48 49 65 66; J2 3 4; J3 3 4; MTH1 1; MTH2 1; MTH3 1; U3 1 8 9 12 13 16 17 24 25; U4 1 8 9 12 13 16 17 24 25; U7 7; U8 1 8 9 12 13 16 17 24 25; U9 1 8 9 12 13 16 17 24 25; U10 1 8 9 12 13 16 17 24 25; U11 1 8 9 12 13 16 17 24 25; U12 1 8 9 12 13 16 17 24 25; U13 1 8 9 12 13 16 17 24 25; U14 13 15 17 19; U16 5 26 27 32 35 37 38 47 55 59 68; U18 5 6 7 8; U19 11; U20 20; U22 1 5 8; U23 1 5 8; U25 1 2 3 4 5 6 7 8 9 11 12 13 14 15 16 17 18 19

## Via types
v1: diameter 0.61, hole 0.33, TOP to BOTTOM, 58 vias
v2: diameter 1.016, hole 0.457, TOP to BOTTOM, 246 vias

## Routing (per net, layer and track width the routed paths; a pad name or vN(x,y) marks a point on that pad's centre or on a via; arc(x,y) is an arc through that point)
AGND: length 56.6
  TOP w0.381: v2(110.07,35.56) U5.3 ; 82.55,34.92 v2(84.67,34.92) ; U6.3 v2(110.07,13.97) ; v2(84.67,38.73) U2.10 ; U2.3 v2(84.67,29.84) ; v2(84.67,21.59) U1.10 ; v2(84.67,17.78) U1.7 ; U1.3 v2(84.67,12.7)
  GND w0.381: J1.1 6.35,18.9 ; J1.1 5.23,17.78 ; J1.1 6.35,16.66 ; J1.1 7.47,17.78 ; 10.31,17.78 J1.33 ; J1.33 11.43,16.66 ; J1.33 11.43,18.9 ; J1.33 12.55,17.78 ; 5.23,20.32 J1.2 ; J1.2 6.35,19.2 ; J1.2 6.35,21.44 ; J1.2 7.47,20.32
  BOTTOM w0.381: C1.2 107.44,31.45 v2(107.53,31.54) ; C22.2 80.12,31.22 v2(80.22,31.12) ; v2(110.07,13.97) 110.07,13.07 109.86,12.85 109.86,9.53 109.64,9.31 v2(106.89,9.31) 106.81,9.23 C6.2 ; v2(84.67,12.7) v2(84.67,17.78) 85.34,17.78 85.73,18.16 85.73,21.21 85.34,21.59 v2(84.67,21.59) ; C21.2 v2(78.11,20.11)
GND: length 446.6
  TOP w0.381: U20.28 v2(18.84,36.2) ; U16.75 v2(64.77,111.97) ; U19.1 v2(32.6,71.75) ; U20.21 v2(32.6,36.2) ; v2(54.4,38.73) U17.1 ; U10.27 v2(109.22,84.03) ; U13.27 v2(85.09,98) ; v2(84.67,27.3) U2.1 ; v2(18.84,71.75) 19.29,71.75 19.33,71.79 20.04,71.79 20.07,71.75 U19.48 ; v2(32.6,80.64) U19.15 ; v2(18.84,48.26) U21.48 21.08,47.66 21.96,46.78 23.28,46.78 v2(23.92,46.14) 19.22,46.14 18.84,45.76 v2(18.84,38.1) U20.25 ; v2(85.09,111.97) v1(85.09,109.86) ; U19.28 v2(18.84,84.45) ; U20.10 v2(32.6,29.21) ; v2(32.6,60.96) U21.21 ; U21.1 v2(32.6,48.26) ; U21.45 v2(18.84,50.16) ; v2(70.91,10.16) U1.20 ; U19.39 v2(18.84,77.47) ; U14.1 v2(54.4,55.88) ; U20.24 v2(32.6,38.1) ; U16.74 68.5,108.08 v2(68.58,108.16) ; v2(85.09,84.03) U8.27 ; v2(32.6,73.66) U19.4 ; v2(32.6,53.98) 30.48,53.98 ; U20.4 v2(32.6,25.4) ; U21.28 v2(18.84,60.96) 17.78,59.9 17.78,58.17 18.16,57.78 18.2,57.78 v2(18.84,57.15) U21.34 ; v2(32.6,77.47) U19.10 ; v2(50.38,73.02) U25.10 ; v2(32.6,84.45) U19.21 ; U20.39 v2(18.84,29.21) ; v2(109.22,111.97) U4.27 ; v2(32.6,57.15) U21.15 ; U20.34 v2(18.84,32.38) ; v2(18.84,25.4) U20.45 ; v2(109.22,98) U3.27 ; U2.20 v2(70.91,27.3) ; v2(54.4,27.3) U17.10 ; v2(32.6,50.16) U21.4 ; v2(18.84,73.66) U19.45 ; U16.17 35.64,101.73 v2(35.56,101.81) ; U19.34 v2(18.84,80.64) ; v2(109.22,70.06) U11.27 ; U20.15 v2(32.6,32.38) ; v2(54.4,10.16) U15.10 ; v2(64.77,78.95) U16.53 ; 21.08,53.98 v2(18.84,53.98) ; v2(54.4,21.59) U15.1 ; U12.27 v2(85.09,70.06) ; U14.10 v2(54.4,44.45) ; U1.1 v2(84.67,10.16)
  BOTTOM w0.381: v2(109.43,80.01) 109.43,80.86 109.35,80.95 C12.2 ; v2(109.43,80.01) 108.68,80.76 108.42,80.76 108.19,80.99 108.19,82.84 108.58,83.23 108.58,83.39 v2(109.22,84.03) 109.22,84.94 109.16,85 109.16,92.01 109.43,92.29 v2(109.43,93.98) ; v2(109.43,80.01) 110.5,78.94 110.5,67.02 110.33,66.85 110.33,66.2 110.18,66.04 v2(109.43,66.04) 109.43,66.89 109.35,66.98 C14.2 109.22,68.07 v2(109.22,70.06) ; 85.3,94.83 v2(85.3,93.98) 85.3,85.15 85.09,84.94 v2(85.09,84.03) 85.22,83.9 85.22,80.95 85.3,80.86 v2(85.3,80.01) 85.3,71.18 85.09,70.97 v2(85.09,70.06) 85.09,68.07 85.22,67.95 85.22,66.98 85.3,66.89 v2(85.3,66.04) ; 85.3,94.83 85.22,94.92 85.22,95.89 ; 85.3,94.83 85.3,94.88 86.36,95.94 86.36,96.73 v2(85.09,98) 85.94,98.85 v2(85.94,107.95) 85.94,108.8 85.85,108.89 C25.2 v1(85.09,109.86) ; v2(18.84,84.45) 18.84,90.81 19.26,91.23 v2(23.92,91.23) 24,91.14 C9.2 ; v2(18.84,84.45) v2(32.6,84.45) 31.11,82.97 31.11,82.13 v2(32.6,80.64) v2(32.6,77.47) ; v2(18.84,84.45) 17.94,83.55 17.94,81.55 v2(18.84,80.64) v2(18.84,77.47) 17.94,76.57 17.94,74.56 v2(18.84,73.66) v2(18.84,71.75) 18.84,70.7 20.53,69 v2(23.92,69) 24,68.92 C10.2 ; v2(18.84,25.4) v2(32.6,25.4) 33.66,25.4 ; v2(18.84,25.4) J1.36 J1.35 ; v2(18.84,25.4) 18.2,24.76 18.2,21.81 18.63,21.38 v2(23.92,21.38) 24,21.29 C15.2 ; v2(18.84,25.4) v2(18.84,29.21) v2(18.84,32.38) 17.14,32.38 17.14,36.2 v2(18.84,36.2) ; U7.12 38.87,26.03 38.24,25.4 33.66,25.4 ; U7.12 40,24.9 40.43,24.48 v2(40.43,23.28) 40.41,23.27 C7.2 38.73,21.59 v2(38.73,19.05) ; U7.12 U7.11 ; U7.12 U7.13 53.13,26.03 v2(54.4,27.3) ; 33.66,25.4 33.66,28.15 v2(32.6,29.21) v2(32.6,32.38) ; v2(109.43,93.98) 109.43,94.83 109.35,94.92 C13.2 ; v2(109.43,93.98) 108.68,94.73 108.42,94.73 108.19,94.96 108.19,96.81 108.58,97.2 108.58,97.36 v2(109.22,98) 109.22,98.91 109.43,99.12 v2(109.43,107.95) ; v2(74.3,22.65) 74.4,22.75 C2.2 ; v2(23.92,46.14) 24,46.06 C11.2 ; C3.2 70.91,7.62 v2(70.91,10.16) ; J1.34 J1.35 ; J1.35 J1.3 ; v2(109.43,107.95) 109.43,108.8 109.35,108.89 C4.2 ; v2(109.43,107.95) 108.68,108.7 108.42,108.7 108.19,108.93 108.19,110.78 108.58,111.17 108.58,111.33 v2(109.22,111.97) ; v2(38.73,6.35) 38.73,3.81 C19.2 ; v2(38.73,6.35) v2(38.73,8.89) ; v2(38.73,6.35) C5.2 ; v2(18.84,57.15) v2(18.84,53.98) 17.78,52.92 17.78,51.22 v2(18.84,50.16) v2(18.84,48.26) ; v2(38.73,13.97) C17.2 ; v2(38.73,13.97) v2(38.73,16.51) ; v2(38.73,13.97) v2(38.73,11.43) ; v2(38.73,16.51) v2(38.73,19.05) ; v2(38.73,16.51) C20.2 ; v2(38.73,19.05) C24.2 ; v2(38.73,8.89) C8.2 ; v2(38.73,8.89) v2(38.73,11.43) ; v2(38.73,11.43) C16.2
GND_EARTH: length 5.5
  BOTTOM w0.381: C18.2 v2(117.9,26.67) ; C23.2 v2(117.9,24.13)
V12N: length 2.5
  BOTTOM w0.381: J1.32 J1.31
VCC: length 358.9
  TOP w0.381: U25.20 v2(37.68,61.59) ; v2(18.84,75.56) U19.42 ; v2(84.67,20.32) U1.9 ; U19.7 v2(32.6,75.56) ; v1(106.05,108.58) 105.02,107.56 101.35,107.56 101,107.21 101,99.67 102.23,98.44 105.19,98.44 v2(106.05,97.58) ; U16.16 35.64,103 v2(35.56,103.08) ; U2.2 v2(84.67,28.58) ; v2(18.84,52.07) U21.42 22.28,52.07 22.86,52.65 22.86,58.67 22.48,59.05 U21.31 v2(18.84,59.05) ; v2(58.42,111.97) U16.80 ; v2(84.67,37.46) 82.55,37.46 ; U21.7 v2(32.6,52.07) ; v2(68.58,105.62) 68.5,105.54 66.55,105.54 ; v2(79.38,9.74) 79.38,10.79 80.01,11.43 U1.2 v2(84.67,11.43) ; v2(81.92,83.61) 81.92,83.06 81.98,82.99 81.98,80.84 81.92,80.77 81.92,80.64 80.89,79.62 77.85,79.62 77.51,79.27 77.51,70.83 77.85,70.48 79.82,70.48 80.67,69.64 v2(81.92,69.64) ; v2(18.84,27.3) U20.42 ; v2(63.5,78.95) U16.52 ; U17.20 v2(68.16,38.73) ; v2(32.6,27.3) U20.7 27.94,27.3 27.3,26.67 v2(27.3,21.38) ; U20.31 v2(18.84,34.29) ; U14.20 v2(67.1,55.88) ; v2(32.6,34.29) U20.18 ; U21.18 v2(32.6,59.05) ; U15.20 v2(68.16,21.59) ; U19.31 v2(18.84,82.55) ; U19.18 v2(32.6,82.55)
  BOTTOM w0.381: 24.38,75.56 24.77,75.95 24.77,82.17 24.38,82.55 v2(18.84,82.55) ; 24.38,75.56 27.69,75.56 ; 24.38,75.56 v2(18.84,75.56) ; v1(106.05,108.58) C4.1 v2(106.05,111.55) ; 27.69,75.56 27.3,75.18 v2(27.3,69) C10.1 ; 27.69,75.56 v2(32.6,75.56) ; 108.59,50.8 108.59,64.14 106.05,66.67 C14.1 v2(106.05,69.64) C12.1 v2(106.05,83.61) C13.1 v2(106.05,97.58) ; 108.59,50.8 D3.1 117.09,48.26 117.48,47.88 D4.1 ; 108.59,50.8 D1.1 100.97,52.96 100.58,53.34 D2.1 ; v2(27.3,21.38) C15.1 ; v2(84.67,11.43) 83.76,11.43 83.19,12.01 83.19,19.74 83.76,20.32 v2(84.67,20.32) ; v2(32.6,34.29) 31.69,34.29 31.11,33.71 31.11,27.3 ; v2(18.84,34.29) 23.75,34.29 24.13,33.91 24.13,27.69 23.75,27.3 ; C28.1 v2(81.92,69.64) ; v2(79.38,9.74) C3.1 79.38,2.92 79.76,2.54 L6.1 ; v2(79.38,26.88) C2.1 ; 31.11,27.3 v2(32.6,27.3) ; 31.11,27.3 23.75,27.3 ; J1.29 J1.30 J1.62 12.7,92.71 25.82,92.71 v2(27.3,91.23) C9.1 ; 23.75,27.3 v2(18.84,27.3) ; v2(82.55,111.76) C25.1 82.55,99.12 81.92,98.48 v2(81.92,97.58) C26.1 81.92,87.35 81.85,87.28 81.85,86.71 81.92,86.64 v2(81.92,83.61) C27.1 ; v2(27.3,46.14) C11.1
A0: length 10.4
  TOP w0.203: U19.47 19.35,72.39 19.18,72.57 18.5,72.57 18.03,72.09 18.03,72 17.73,71.7 14.95,71.7 14.54,71.3 14.47,71.3 14.29,71.12 J1.54
A1: length 10.1
  TOP w0.203: U19.46 19.35,73.02 19.3,72.97 18.37,72.97 18.32,73.02 12.9,73.02 12.7,73.23 12.7,73.48 12.52,73.66 J1.55
A2: length 11.5
  TOP w0.203: U19.44 19.35,74.3 19.18,74.47 18.5,74.47 18.32,74.3 12.9,74.3 12.7,74.5 12.7,76 12.5,76.2 J1.56
A3: length 13.3
  TOP w0.203: J1.57 13.13,78.74 13.33,78.54 13.33,75.13 13.54,74.93 18.32,74.93 18.37,74.88 19.3,74.88 19.35,74.93 U19.43
A4: length 14.6
  TOP w0.203: J1.58 13.77,81.28 13.97,81.08 13.97,76.4 14.17,76.2 18.32,76.2 18.5,76.38 19.18,76.38 19.35,76.2 U19.41
A5: length 16.4
  TOP w0.203: U19.40 19.35,76.83 19.3,76.78 18.37,76.78 18.32,76.83 14.81,76.83 14.6,77.04 14.6,83.62 14.4,83.82 J1.59
A6: length 17.8
  TOP w0.203: U19.38 19.35,78.11 19.18,78.28 18.5,78.28 18.32,78.11 15.44,78.11 15.24,78.31 15.24,86.16 15.04,86.36 J1.60
A7: length 19.6
  TOP w0.203: U19.37 16.08,78.74 15.88,78.94 15.88,88.7 15.67,88.9 J1.61
A8: length 16.3
  TOP w0.203: J1.13 7.8,46.81 16.24,46.81 18.5,49.07 19.18,49.07 19.35,48.89 U21.47
A9: length 15.5
  TOP w0.203: J1.14 7.62,49.53 10.58,49.53 10.81,49.3 12.05,49.3 12.28,49.53 18.32,49.53 18.37,49.48 19.3,49.48 19.35,49.53 U21.46
A10: length 16.8
  TOP w0.203: U21.44 19.58,50.8 19.41,50.98 13.15,50.98 11.88,49.71 10.98,49.71 9.02,51.66 8.03,51.66 J1.15
A11: length 16.6
  TOP w0.203: U21.43 19.35,51.43 19.3,51.38 18.37,51.38 17.69,52.07 10.16,52.07 J1.16
A12: length 17.1
  TOP w0.203: J1.17 10.16,54.61 15.3,54.61 17.03,52.88 19.41,52.88 19.58,52.7 U21.41
A13: length 17.9
  TOP w0.203: U21.40 19.35,53.34 19.3,53.29 18.37,53.29 18.32,53.34 17.14,53.34 13.33,57.15 10.16,57.15 J1.18
A14: length 18.4
  TOP w0.203: U21.38 19.58,54.61 19.41,54.79 16.97,54.79 12.06,59.69 10.16,59.69 J1.19
A15: length 19.2
  TOP w0.203: J1.20 10.16,62.23 11.71,62.23 18.69,55.24 U21.37
A16: length 11.7
  TOP w0.203: U20.36 18.41,31.12 17.14,29.84 17.14,28.58 16.51,27.94 J1.37
A17: length 10.3
  TOP w0.203: U20.35 19.35,31.75 19.18,31.57 18.5,31.57 18.32,31.75 17.78,31.75 16.51,30.48 J1.38
A18: length 9.8
  TOP w0.203: U20.33 19.35,33.02 19.18,33.2 18.5,33.2 18.32,33.02 J1.39
A19: length 11.1
  TOP w0.203: J1.40 12.5,35.56 12.7,35.36 12.7,34.29 13.33,33.66 18.32,33.66 18.37,33.6 19.3,33.6 19.35,33.66 U20.32
A20: length 11
  TOP w0.203: U20.30 19.58,34.92 19.53,34.98 15.82,34.98 12.7,38.1 J1.41
A21: length 11.9
  TOP w0.203: J1.42 16.69,35.38 19.18,35.38 19.35,35.56 U20.29
A22: length 44.8
  TOP w0.203: J1.43 17.6,37.01 19.41,37.01 19.58,36.83 U20.27 23.06,36.83 23.27,37.03 23.27,41.52 23.69,41.94 v1(23.69,42.55)
  BOTTOM w0.203: U7.2 34.49,51.43 34.29,51.23 34.29,43.38 34.09,43.18 28.57,43.18 28.36,42.98 24.12,42.98 v1(23.69,42.55)
A23: length 49.2
  TOP w0.203: J1.44 12.52,45.72 12.7,45.54 12.7,42.75 18.03,37.41 19.3,37.41 19.35,37.46 U20.26 22.65,37.46 22.86,37.67 v1(22.86,42.72)
  BOTTOM w0.203: U7.1 33.86,53.98 33.66,53.77 33.66,44.02 33.45,43.81 28.57,43.81 28.37,43.61 28.37,43.56 28.19,43.38 23.52,43.38 v1(22.86,42.72)
AEN/: length 44.5
  BOTTOM w0.203: U7.8 35.13,36.2 34.92,36.4 34.92,39.8 34.72,40 16.08,40 14.6,41.48 14.6,53.14 14.4,53.34 J1.47
BD8: length 51.7
  TOP w0.203: U21.23 35.56,62.23 38.1,59.69 38.1,24.33 37.9,24.13 U20.2
BD9: length 50
  TOP w0.203: U21.22 32.08,61.59 32.26,61.77 35.38,61.77 37.47,59.69 37.47,24.77 37.29,24.59 32.26,24.59 32.08,24.77 U20.3
BD10: length 46.5
  TOP w0.203: U21.20 32.08,60.32 32.26,60.15 32.93,60.15 33.11,60.32 36.2,60.32 36.83,59.69 36.83,26.67 36.2,26.03 33.11,26.03 32.93,26.21 32.26,26.21 32.08,26.03 U20.5
BD11: length 44.3
  TOP w0.203: U21.19 32.08,59.69 32.13,59.74 33.06,59.74 33.11,59.69 35.99,59.69 36.2,59.49 36.2,26.87 35.99,26.67 33.11,26.67 33.06,26.62 32.13,26.62 32.08,26.67 U20.6
D0: length 35.2
  TOP w0.203: U19.26 17.35,85.72 17.14,85.93 17.14,94.54 16.26,95.43 5.28,95.43 5.08,95.22 5.08,86.54 5.26,86.36 J1.28
D1: length 47.8
  TOP w0.203: U19.27 21.51,85.09 21.64,85.22 22.28,85.22 22.58,85.51 22.58,86.57 22.28,86.87 19.88,86.87 19.37,86.36 18.41,86.36 17.78,87 17.78,97.59 17.58,97.79 4.65,97.79 4.44,97.59 4.44,84.02 4.65,83.82 J1.27
D2: length 54.5
  TOP w0.203: J1.26 4.01,81.28 3.81,81.48 3.81,98.22 4.01,98.42 18.21,98.42 18.41,98.22 18.41,87.2 18.62,87 19.43,87 19.71,87.27 22.45,87.27 22.99,86.74 22.99,85.34 22.58,84.94 22.58,84.24 22.28,83.95 22.05,83.95 21.92,83.82 U19.29
D3: length 60.4
  TOP w0.203: U19.30 22.25,83.19 22.45,83.39 22.45,83.48 22.58,83.61 22.58,83.67 22.99,84.07 22.99,84.77 23.39,85.17 23.39,86.91 22.62,87.68 19.54,87.68 19.49,87.63 19.25,87.63 19.05,87.83 19.05,98.86 18.85,99.06 3.38,99.06 3.17,98.86 3.17,78.94 3.38,78.74 J1.25
D4: length 67.2
  TOP w0.203: U19.32 22.66,81.91 22.86,82.12 22.86,83.31 22.99,83.44 22.99,83.5 23.39,83.9 23.39,84.6 23.8,85 23.8,87.08 22.86,88.02 22.86,88.06 22.66,88.27 19.89,88.27 19.68,88.47 19.68,99.49 19.48,99.69 2.74,99.69 2.54,99.49 2.54,76.4 2.74,76.2 J1.24
D5: length 42
  TOP w0.203: U19.33 23.29,81.28 23.49,81.08 23.49,70.69 23.29,70.48 22.67,70.48 22.63,70.43 19.82,70.43 19.52,70.13 18.16,70.13 17.81,70.48 15.46,70.48 12.05,67.08 10.81,67.08 10.58,67.31 7.2,67.31 6.97,67.08 5.73,67.08 5.5,67.31 4.65,67.31 4.44,67.51 4.44,73.46 4.65,73.66 J1.23
D6: length 71.7
  TOP w0.203: J1.22 5.28,71.12 5.08,70.92 5.08,68.3 5.9,67.49 6.8,67.49 7.03,67.72 9.52,67.72 9.93,68.13 10.34,68.13 10.98,67.49 11.88,67.49 12.52,68.13 12.52,68.81 12.73,69.01 13.33,69.01 14.81,70.48 14.88,70.48 15.29,70.89 17.98,70.89 18.33,70.54 19.35,70.54 19.65,70.84 22.45,70.84 22.5,70.89 22.89,70.89 23.09,71.09 23.09,79.81 22.89,80.01 U19.35 ; U20.47 19.25,24.13 19.05,23.93 19.05,16.08 18.85,15.88 4.65,15.88 4.44,16.08 4.44,25.2 4.65,25.4 J1.4
D7: length 27.2
  TOP w0.203: U19.36 22.45,79.38 22.66,79.17 22.66,71.5 22.45,71.3 22.33,71.3 22.28,71.25 19.88,71.25 19.83,71.3 19.53,71.3 19.18,70.94 18.5,70.94 18.15,71.3 15.12,71.3 14.71,70.89 14.64,70.89 14.23,70.48 12.34,70.48 11.88,70.03 10.75,70.03 10.58,69.85 7.62,69.85 J1.21
D9: length 33.4
  TOP w0.203: U20.46 19.35,24.77 19.18,24.59 19.13,24.59 18.41,23.87 18.41,16.71 18.21,16.51 8,16.51 7.62,16.89 7.62,27.76 7.44,27.94 J1.5
D10: length 32.3
  TOP w0.203: U20.44 19.35,26.03 19.18,26.21 18.5,26.21 17.78,25.49 17.78,19.43 17.58,19.23 8.46,19.23 8.25,19.43 8.25,30.28 8.05,30.48 J1.6
D11: length 29.9
  TOP w0.203: U20.43 19.35,26.67 19.18,26.49 18.5,26.49 18.37,26.62 18.33,26.62 17.14,25.43 17.14,21.97 16.94,21.77 9.09,21.77 8.89,21.97 8.89,32.82 8.69,33.02 J1.7
D12: length 28.9
  TOP w0.203: J1.8 9.32,35.56 9.52,35.36 9.52,24.51 9.91,24.13 16.31,24.13 16.51,24.33 16.51,26.67 17.96,28.12 19.18,28.12 19.35,27.94 U20.41
D13: length 59.1
  TOP w0.203: 21.08,28.58 22.66,28.58 22.86,28.37 22.86,15.44 22.66,15.24 4.01,15.24 3.81,15.44 3.81,37.9 4.01,38.1 J1.9
D14: length 71.8
  TOP w0.203: J1.10 3.38,40.64 3.17,40.44 3.17,14.81 3.38,14.61 25.83,14.61 26.04,14.81 26.04,29.64 25.83,29.84 U20.38
D15: length 33.1
  TOP w0.203: U20.37 18.41,30.48 17.62,29.68 17.62,28.36 15.93,26.67 10.36,26.67 10.16,26.87 10.16,42.55 9.52,43.18 J1.11
DDIR: length 34.9
  TOP w0.203: U7.19 45.92,41.27 45.72,41.07 45.72,24.13 45.08,23.49 41.37,23.49 40.77,24.1 40.09,24.1 39.49,23.49 U20.1
MRD/: length 44.6
  BOTTOM w0.203: U7.9 34.49,33.66 34.29,33.86 34.29,39.4 34.09,39.6 15.91,39.6 14.87,40.64 14.17,40.64 13.97,40.84 13.97,50.6 13.77,50.8 J1.46
MWR/: length 44.8
  BOTTOM w0.203: U7.10 33.86,31.12 33.66,31.32 33.66,38.99 33.45,39.19 15.74,39.19 14.93,40 13.54,40 13.33,40.21 13.33,48.06 13.13,48.26 J1.45
N00036_6360: length 58.6
  TOP w0.203: 100.33,12.07 100.33,15.04 100.53,15.24 U6.5 ; 100.33,12.07 100.33,11.63 100.13,11.43 89.1,11.43 88.9,11.63 88.9,14.61 88.27,15.24 U1.5 80.85,15.24 80.64,15.44 80.64,18.85 80.85,19.05 U1.8 ; 100.33,12.07 100.97,12.07 ; L6.2 100.76,2.54 100.97,2.74 100.97,12.07 ; 100.97,12.07 v1(100.97,13.34)
  BOTTOM w0.203: R4.1 v1(100.97,13.34) 100.97,17.58 101.17,17.78 R3.1
N00038_6372: length 20.3
  TOP w0.203: v1(80.01,12.7) 80.01,13.34 80.64,13.97 U1.4 85.52,13.97 85.73,13.77 85.73,6.55 85.93,6.35 L3.2
  BOTTOM w0.203: C21.1 v1(80.01,12.7)
N00048_6359: length 7.5
  TOP w0.203: U6.2 106.25,12.7 105.44,13.51 105.44,15.9 v1(106.05,16.51)
  BOTTOM w0.203: R3.2 106.05,17.55 v1(106.05,16.51)
N00060_6368: length 16.8
  TOP w0.203: U1.6 88.06,16.51 88.27,16.71 88.27,20.12 88.47,20.32 93.78,20.32 93.98,20.12 U23.3
OUTA: length 10.2
  BOTTOM w0.203: U23.6 91.08,14.07 90.98,13.97 90.37,13.97 90.17,14.17 L1.1
RA0: length 107.8
  TOP w0.203: U4.5 107.95,98.55 107.72,98.32 107.72,97.53 107.67,97.48 107.67,97.26 107.34,96.93 107.34,94.84 107.49,94.69 107.49,93.8 107.95,93.34 U3.5 107.95,83.31 107.7,83.31 107.34,82.96 107.34,80.87 107.95,80.26 U10.5 107.95,70.99 107.67,70.71 107.67,68.96 107.29,68.58 107.29,60.48 107.95,59.82 U11.5 107.95,56.21 107.75,56.01 100.99,56.01 100.79,56.21 100.79,60.68 100.79,60.68 100.79,61.7 100.79,61.7 100.79,62.26 100.58,62.46 84.02,62.46 83.82,62.26 83.82,60.96 ; v1(83.82,87) U13.5 ; U8.5 v1(83.82,71.12) ; U9.5 83.82,99.54 v1(84.3,99.06) ; v1(83.19,60.32) 83.82,60.96 ; 83.82,60.96 U12.5
  BOTTOM w0.203: v1(83.82,87) 83.82,93.98 84.15,94.31 84.15,98.21 84.3,98.36 v1(84.3,99.06) ; v1(83.82,71.12) 83.82,64.14 83.19,63.5 v1(83.19,60.32)
RA1: length 112.3
  TOP w0.203: 82.55,60.96 U12.4 ; 82.55,60.96 82.55,62.66 82.75,62.86 101.17,62.86 101.19,62.84 101.19,61.87 101.2,61.87 101.2,60.51 101.19,60.51 101.19,56.62 101.4,56.41 106.48,56.41 106.68,56.62 U11.4 106.68,59.82 106.05,60.45 106.05,68.83 106.38,68.83 106.86,69.3 106.86,69.98 106.38,70.45 106.38,71.13 106.68,71.42 U10.4 106.68,80.26 106.07,80.87 106.07,82.8 105.71,82.8 105.23,83.27 105.23,83.95 105.71,84.42 106.22,84.42 106.68,84.88 U3.4 v1(106.68,93.34) ; 82.55,60.96 v1(81.92,60.32) ; v1(83.28,98.52) 82.55,99.25 U9.4 ; v1(82.55,87) U13.4 ; U8.4 v1(82.55,71.12) ; v1(106.68,99.06) U4.4
  BOTTOM w0.203: v1(106.68,93.34) 107.11,93.78 107.11,98.63 v1(106.68,99.06) ; v1(82.55,71.12) 83.19,70.48 83.19,65.41 81.92,64.14 v1(81.92,60.32) ; v1(83.28,98.52) 83.28,94.07 82.55,93.34 v1(82.55,87) 82.55,85.72 83.19,85.09
RA2: length 109.3
  TOP w0.203: U9.3 v1(81.28,99.69) ; v1(80.64,60.32) 81.28,60.96 ; 81.28,60.96 U12.3 ; 81.28,60.96 81.28,63.3 81.48,63.5 101.4,63.5 101.6,63.3 101.6,62.04 101.6,62.04 101.6,60.34 101.6,60.34 101.6,57.02 101.8,56.82 105.21,56.82 105.41,57.02 U11.3 105.41,59.21 104.78,59.84 104.78,68.96 104.72,69.01 104.72,70.62 105.41,71.31 U10.3 105.41,80.01 104.78,80.64 104.78,82.58 104.42,82.93 104.42,84.29 105.41,85.28 U3.3 v1(105.41,93.34) ; v1(106.05,99.06) 106.05,99.69 U4.3 ; v1(80.64,88.27) 80.64,87 U13.3 ; v1(81.28,70.79) U8.3
  BOTTOM w0.203: v1(81.28,70.79) 80.64,70.15 v1(80.64,60.32) ; v1(81.28,99.69) 80.85,99.26 80.85,93.14 81.28,92.71 81.28,88.9 v1(80.64,88.27) ; v1(106.05,99.06) 104.98,97.99 104.98,93.78 v1(105.41,93.34)
RA3: length 87.3
  TOP w0.203: U9.2 v1(80.01,99.69) ; v1(104.14,99.06) U4.2 ; 80.01,73.02 U8.2 ; v1(80.01,87) U13.2 ; v1(104.14,93.34) U3.2 104.14,85.16 104.03,85.05 103.61,84.63 103.61,83.92 103.51,83.82 103.51,81.86 103.53,81.83 103.53,80.87 103.91,80.49 103.91,80.24 104.14,80.01 U10.2 104.14,71.19 103.91,70.96 103.91,69.37 103.53,68.99 103.53,68.03 103.51,68 103.51,65.41 ; 103.51,65.41 102.23,64.14 80.01,64.14 U12.2 ; 103.51,65.41 103.51,59.84 104.14,59.21 U11.2
  BOTTOM w0.203: v1(80.01,99.69) v1(80.01,87) ; v1(104.14,93.34) v1(104.14,99.06)
RA4: length 99.8
  TOP w0.203: U12.32 76.4,67.95 76.2,68.15 76.2,81.71 76.4,81.91 ; U8.32 76.4,81.91 ; 76.4,81.91 76.2,82.12 76.2,95.68 76.4,95.89 77.04,95.89 ; 77.04,95.89 76.2,96.72 76.2,109.65 76.4,109.86 U9.32 ; 77.04,95.89 U13.32 ; U11.32 102.87,69.34 103.51,69.98 103.51,79.88 102.87,80.52 U10.32 102.87,84.47 103.25,84.85 103.51,85.11 103.51,93.4 102.87,94.04 U3.32 102.87,96.67 102.44,97.1 102.25,97.1 102.23,97.13 101.69,97.13 99.7,99.12 99.7,109.65 99.9,109.86 U4.32
RA5: length 108.6
  TOP w0.203: U11.31 104.14,68.06 104.32,68.24 104.32,70.79 104.78,71.25 104.78,80.07 104.32,80.53 104.32,81.62 104.14,81.8 U10.31 104.01,82.04 104.01,84.46 104.6,85.05 104.78,85.22 104.78,93.4 104.14,94.04 U3.31 104.14,96.67 103.71,97.1 103.52,97.1 103.09,97.54 101.86,97.54 100.1,99.29 100.1,108.25 100.3,108.46 103.12,108.46 104.14,109.47 U4.31 ; U12.31 80.01,68.73 79.4,69.34 76.81,69.34 76.61,69.55 76.61,80.31 76.81,80.52 79.4,80.52 80.01,81.13 U8.31 80.01,82.7 79.4,83.31 76.81,83.31 76.61,83.52 76.61,94.28 76.81,94.49 79.81,94.49 80.01,94.69 U13.31 80.01,96.67 79.4,97.28 76.81,97.28 76.61,97.49 76.61,108.25 76.81,108.46 79.4,108.46 80.01,109.07 U9.31
RA6: length 115.4
  TOP w0.203: U12.30 81.28,68.33 79.86,69.75 77.04,69.75 77.01,69.77 77.01,80.09 77.04,80.11 80.26,80.11 81.28,81.13 U8.30 81.28,82.7 80.85,83.13 80.85,83.62 80.65,83.82 77.22,83.82 77.01,84.02 77.01,93.88 77.22,94.08 80.26,94.08 81.28,95.1 U13.30 81.28,96.67 80.26,97.69 77.22,97.69 77.01,97.89 77.01,107.85 77.22,108.05 81.08,108.05 81.28,108.25 U9.30 ; U4.30 105.41,109.07 104.98,108.64 104.98,108.25 104.78,108.05 100.71,108.05 100.51,107.85 100.51,99.46 102.03,97.94 103.47,97.94 103.48,97.94 104,97.94 104.29,97.94 104.37,97.94 104.83,97.49 104.83,97.07 105.41,96.49 U3.30 105.41,94.49 106.05,93.85 106.05,85.34 104.83,84.12 104.83,83.1 105.41,82.52 U10.30 105.41,80.63 106.05,80 106.05,71.37 105.13,70.45 105.13,69.18 105.41,68.9 U11.30
RA7: length 107.6
  TOP w0.203: 107.11,83.13 107.31,83.34 107.31,93.4 107.09,93.63 107.09,94.52 106.68,94.93 U3.29 106.68,97.06 107.31,97.7 107.31,108.43 106.68,109.07 U4.29 ; 107.11,83.13 107.3,83.13 107.38,83.22 107.54,83.22 107.54,83.16 107.34,82.96 107.34,80.37 107.31,80.34 107.31,71.37 106.86,70.92 106.86,70.55 107.26,70.15 107.26,69.13 106.86,68.72 106.86,68.12 U11.29 ; 107.11,83.13 106.68,82.7 U10.29 ; U12.29 82.55,68.73 83.19,69.37 83.19,79.88 82.55,80.52 U8.29 82.55,82.7 82.98,83.13 82.98,84.02 82.58,84.42 77.62,84.42 77.42,84.63 77.42,93.47 77.62,93.68 81.03,93.68 82.55,95.19 U13.29 82.55,96.51 82.54,96.51 82.73,96.7 82.73,97.92 82.25,98.39 81.58,98.39 81.28,98.09 77.62,98.09 77.42,98.3 77.42,107.44 77.62,107.65 82.24,107.65 82.55,107.95 U9.29
RA8: length 107
  TOP w0.203: U11.28 107.95,68.66 108.08,68.79 108.08,69.98 108.41,70.31 108.41,70.4 108.59,70.58 108.59,80.49 107.95,81.13 U10.28 107.95,82.7 108.38,83.13 108.38,84.25 108.59,84.45 108.59,93.85 107.95,94.49 U3.28 107.95,96.67 108.41,97.13 108.41,98.43 108.65,98.67 108.65,99.3 108.59,99.36 108.59,107.82 107.95,108.46 U4.28 ; U9.28 83.82,108.15 82.91,107.24 78.03,107.24 77.83,107.04 77.83,98.7 78.03,98.5 81.11,98.5 81.41,98.8 82.42,98.8 83.13,98.09 83.13,97.36 83.82,96.67 U13.28 83.82,95.1 81.99,93.27 78.03,93.27 77.83,93.07 77.83,85.17 78.03,84.96 80.77,84.96 80.91,84.83 82.87,84.83 83.02,84.68 83.35,84.68 83.82,84.21 U8.28 83.82,80.52 84.45,79.88 84.45,70.48 83.82,69.85 U12.28
RA9: length 87
  TOP w0.203: U11.22 115.57,69.85 116.2,70.48 116.2,79.88 115.57,80.52 U10.22 115.57,83.82 116.2,84.45 116.2,93.85 115.57,94.49 U3.22 115.57,97.79 116.2,98.42 116.2,107.82 115.57,108.46 U4.22 ; U9.22 91.44,108.46 92.08,107.82 92.08,98.42 91.44,97.79 U13.22 91.44,94.49 92.08,93.85 92.08,84.45 91.44,83.82 U8.22 91.44,80.52 92.08,79.88 92.08,70.48 91.44,69.85 U12.22
RA10: length 87
  TOP w0.203: U12.21 92.71,69.85 93.34,70.48 93.34,79.88 92.71,80.52 U8.21 92.71,83.82 93.34,84.45 93.34,93.85 92.71,94.49 U13.21 92.71,97.79 93.34,98.42 93.34,107.82 92.71,108.46 U9.21 ; U11.21 116.84,69.85 117.48,70.48 117.48,79.88 116.84,80.52 U10.21 116.84,83.82 117.48,84.45 117.48,93.85 116.84,94.49 U3.21 116.84,97.79 117.48,98.42 117.48,107.82 116.84,108.46 U4.21
RA11: length 87
  TOP w0.203: U4.20 118.11,108.46 118.75,107.82 118.75,98.42 118.11,97.79 U3.20 118.11,94.49 118.75,93.85 118.75,84.45 118.11,83.82 U10.20 118.11,80.07 118.75,79.43 118.75,70.48 118.11,69.85 U11.20 ; U9.20 93.98,108.46 94.62,107.82 94.62,98.42 93.98,97.79 U13.20 93.98,94.04 94.62,93.4 94.62,84.45 93.98,83.82 U8.20 93.98,80.07 94.62,79.43 94.62,70.48 93.98,69.85 U12.20
RA12: length 87
  TOP w0.203: U4.19 119.38,108.46 120.02,107.82 120.02,98.42 119.38,97.79 U3.19 119.38,94.56 120.02,93.92 120.02,84.45 119.38,83.82 U10.19 119.38,80.07 120.02,79.43 120.02,70.48 119.38,69.85 U11.19 ; U9.19 95.25,108.46 95.89,107.82 95.89,98.42 95.25,97.79 U13.19 95.25,94.04 95.89,93.4 95.89,84.45 95.25,83.82 U8.19 95.25,80.07 95.89,79.43 95.89,70.48 95.25,69.85 U12.19
RA13: length 87
  TOP w0.203: U9.18 96.52,108.46 97.16,107.82 97.16,98.42 96.52,97.79 U13.18 96.52,94.49 97.16,93.85 97.16,84.45 96.52,83.82 U8.18 96.52,80.52 97.16,79.88 97.16,70.48 96.52,69.85 U12.18 ; U11.18 120.65,68.73 121.28,69.37 121.28,79.88 120.65,80.52 U10.18 120.65,83.82 121.28,84.45 121.28,94.46 120.65,95.1 U3.18 120.65,97.79 121.28,98.42 121.28,107.82 120.65,108.46 U4.18
RA14: length 119.2
  TOP w0.203: v1(96.52,70.48) U8.15 96.52,79.38 95.89,80.01 95.89,83.82 96.52,84.45 U13.15 96.52,93.34 95.89,93.98 95.89,97.79 96.52,98.42 U9.15 ; v1(96.52,60.02) U12.15 96.52,54.18 96.72,53.98 120.45,53.98 120.65,54.18 U11.15 120.65,64.97 120.02,65.61 120.02,69.22 120.65,69.85 U10.15 120.65,79.38 120.02,80.01 120.02,83.82 120.65,84.45 U3.15 120.65,93.98 120.02,94.61 120.02,97.79 120.65,98.42 U4.15
  BOTTOM w0.203: v1(96.52,60.02) v1(96.52,70.48)
RA15: length 121.9
  TOP w0.203: 95.25,60.76 98.53,60.76 99.16,60.12 99.16,54.58 99.36,54.38 119.18,54.38 119.38,54.58 U11.14 119.38,64.77 118.75,65.41 118.75,69.85 119.38,70.48 U10.14 119.38,79.38 118.75,80.01 118.75,83.82 119.38,84.45 U3.14 119.38,93.98 118.75,94.61 118.75,97.79 119.38,98.42 U4.14 ; 95.25,60.76 U12.14 ; 95.25,60.76 95.05,60.76 v1(94.62,60.32) ; U9.14 95.25,98.42 94.62,97.79 94.62,93.98 95.25,93.34 U13.14 95.25,84.45 94.62,83.82 94.62,80.01 95.25,79.38 U8.14 v1(95.25,70.48)
  BOTTOM w0.203: v1(95.25,70.48) 94.62,69.85 v1(94.62,60.32)
RD0: length 36.6
  TOP w0.203: U9.26 86.36,113.46 86.16,113.66 57.35,113.66 57.15,113.46 U16.81
RD1: length 42.9
  TOP w0.203: U16.82 55.88,114.1 56.08,114.3 89.97,114.3 90.17,114.1 U9.23
RD6: length 63.9
  TOP w0.203: 90.17,61.39 90.17,61.59 99.74,61.59 99.98,61.36 99.98,61.02 99.97,61.02 99.97,55.4 100.18,55.19 114.1,55.19 114.3,55.4 U11.10 ; 90.17,61.39 U12.10 ; 90.17,61.39 v1(89.32,60.54) ; v1(90.17,84.45) U13.10
  BOTTOM w0.203: v1(90.17,84.45) 89.53,83.82 89.53,61.57 89.32,61.35 v1(89.32,60.54)
RD7: length 63.3
  TOP w0.203: U12.7 v1(86.36,60.32) 88.04,62 99.91,62 100.38,61.53 100.38,60.85 100.38,60.85 100.38,55.8 100.58,55.6 110.29,55.6 110.49,55.8 U11.7 ; v1(86.36,84.45) U13.7
  BOTTOM w0.203: v1(86.36,60.32) 86.36,62.66 87.2,63.5 87.43,63.5 87.63,63.7 87.63,84.25 87.43,84.45 v1(86.36,84.45)
V+12: length 28.4
  TOP w0.381: v1(106.05,15.24) U6.4
  BOTTOM w0.381: J1.64 J1.63 ; v1(106.05,15.24) 105.41,14.61 105.41,8 105.03,7.62 C6.1 100.08,7.62 99.7,8 99.7,11.43 99.06,12.07 94.36,12.07 93.98,12.45 93.98,13.34
VCLKA: length 38.6
  TOP w0.203: U15.11 v1(69.7,10.16) ; v1(69.85,21.59) U1.11 ; v1(69.85,38.73) U2.11
  BOTTOM w0.203: v1(69.7,10.16) 69.7,20.83 69.85,20.98 v1(69.85,21.59) v1(69.85,38.73)
VD0: length 41.3
  TOP w0.203: v1(54.91,20.32) U15.2 63.5,20.32 64.64,21.46 64.64,36.96 64.14,37.46 U17.2 v1(54.91,37.46)
  BOTTOM w0.203: v1(54.91,20.32) 51.03,20.32 R7.2
VD1: length 44.6
  TOP w0.203: U15.3 v1(54.91,19.05) 53.54,19.05 53.34,19.25 53.34,21.68 54.52,22.86 63.77,22.86 64.24,23.32 64.24,36.09 64.14,36.2 U17.3 v1(54.91,36.2)
  BOTTOM w0.203: v1(54.91,19.05) R13.2
VD2: length 42.9
  TOP w0.203: 56.52,34.92 63.02,34.92 63.83,34.11 63.83,24.31 63.02,23.49 54.55,23.49 52.7,21.65 52.7,17.98 52.91,17.78 v1(54.91,17.78) U15.4
  BOTTOM w0.203: v1(54.91,17.78) 52.07,17.78 50.8,16.51 R14.2
VD3: length 43.1
  TOP w0.203: U15.5 v1(54.91,16.51) 52.27,16.51 52.07,16.71 52.07,21.59 54.61,24.13 62.66,24.13 62.86,24.33 62.86,33.45 62.66,33.66 U17.5
  BOTTOM w0.203: v1(54.91,16.51) 54.05,16.51 51.51,13.97 R15.2
VD4: length 42
  TOP w0.203: U15.6 v1(54.91,15.24) 51.64,15.24 51.44,15.44 51.44,21.59 54.61,24.77 61.39,24.77 61.59,24.97 61.59,32.18 61.39,32.38 U17.6
  BOTTOM w0.203: v1(54.91,15.24) 51.1,11.43 R9.2
VD5: length 42
  TOP w0.203: U17.7 60.12,31.12 60.33,30.91 60.33,25.6 60.12,25.4 54.61,25.4 50.8,21.59 50.8,14.61 51,14.4 54.48,14.4 v1(54.91,13.97) U15.7
  BOTTOM w0.203: v1(54.91,13.97) 54.48,13.54 54.18,13.54 52.07,11.43 52.07,9.09 51.87,8.89 R8.2
